# Altium PCB Grabber.PCBDOC (part 1 of 5)
Units mil, origin at the board's own origin, x right, y up, seen from the top; angles counter-clockwise.
Board outline 2854.33 x 3937 mil, 4 copper layers (TopLayer, Internal Plane 2, Layer 1, Bottom Layer), stack 60.752 mil thick; 159 components, 116 nets, 684 pads, 241 vias.
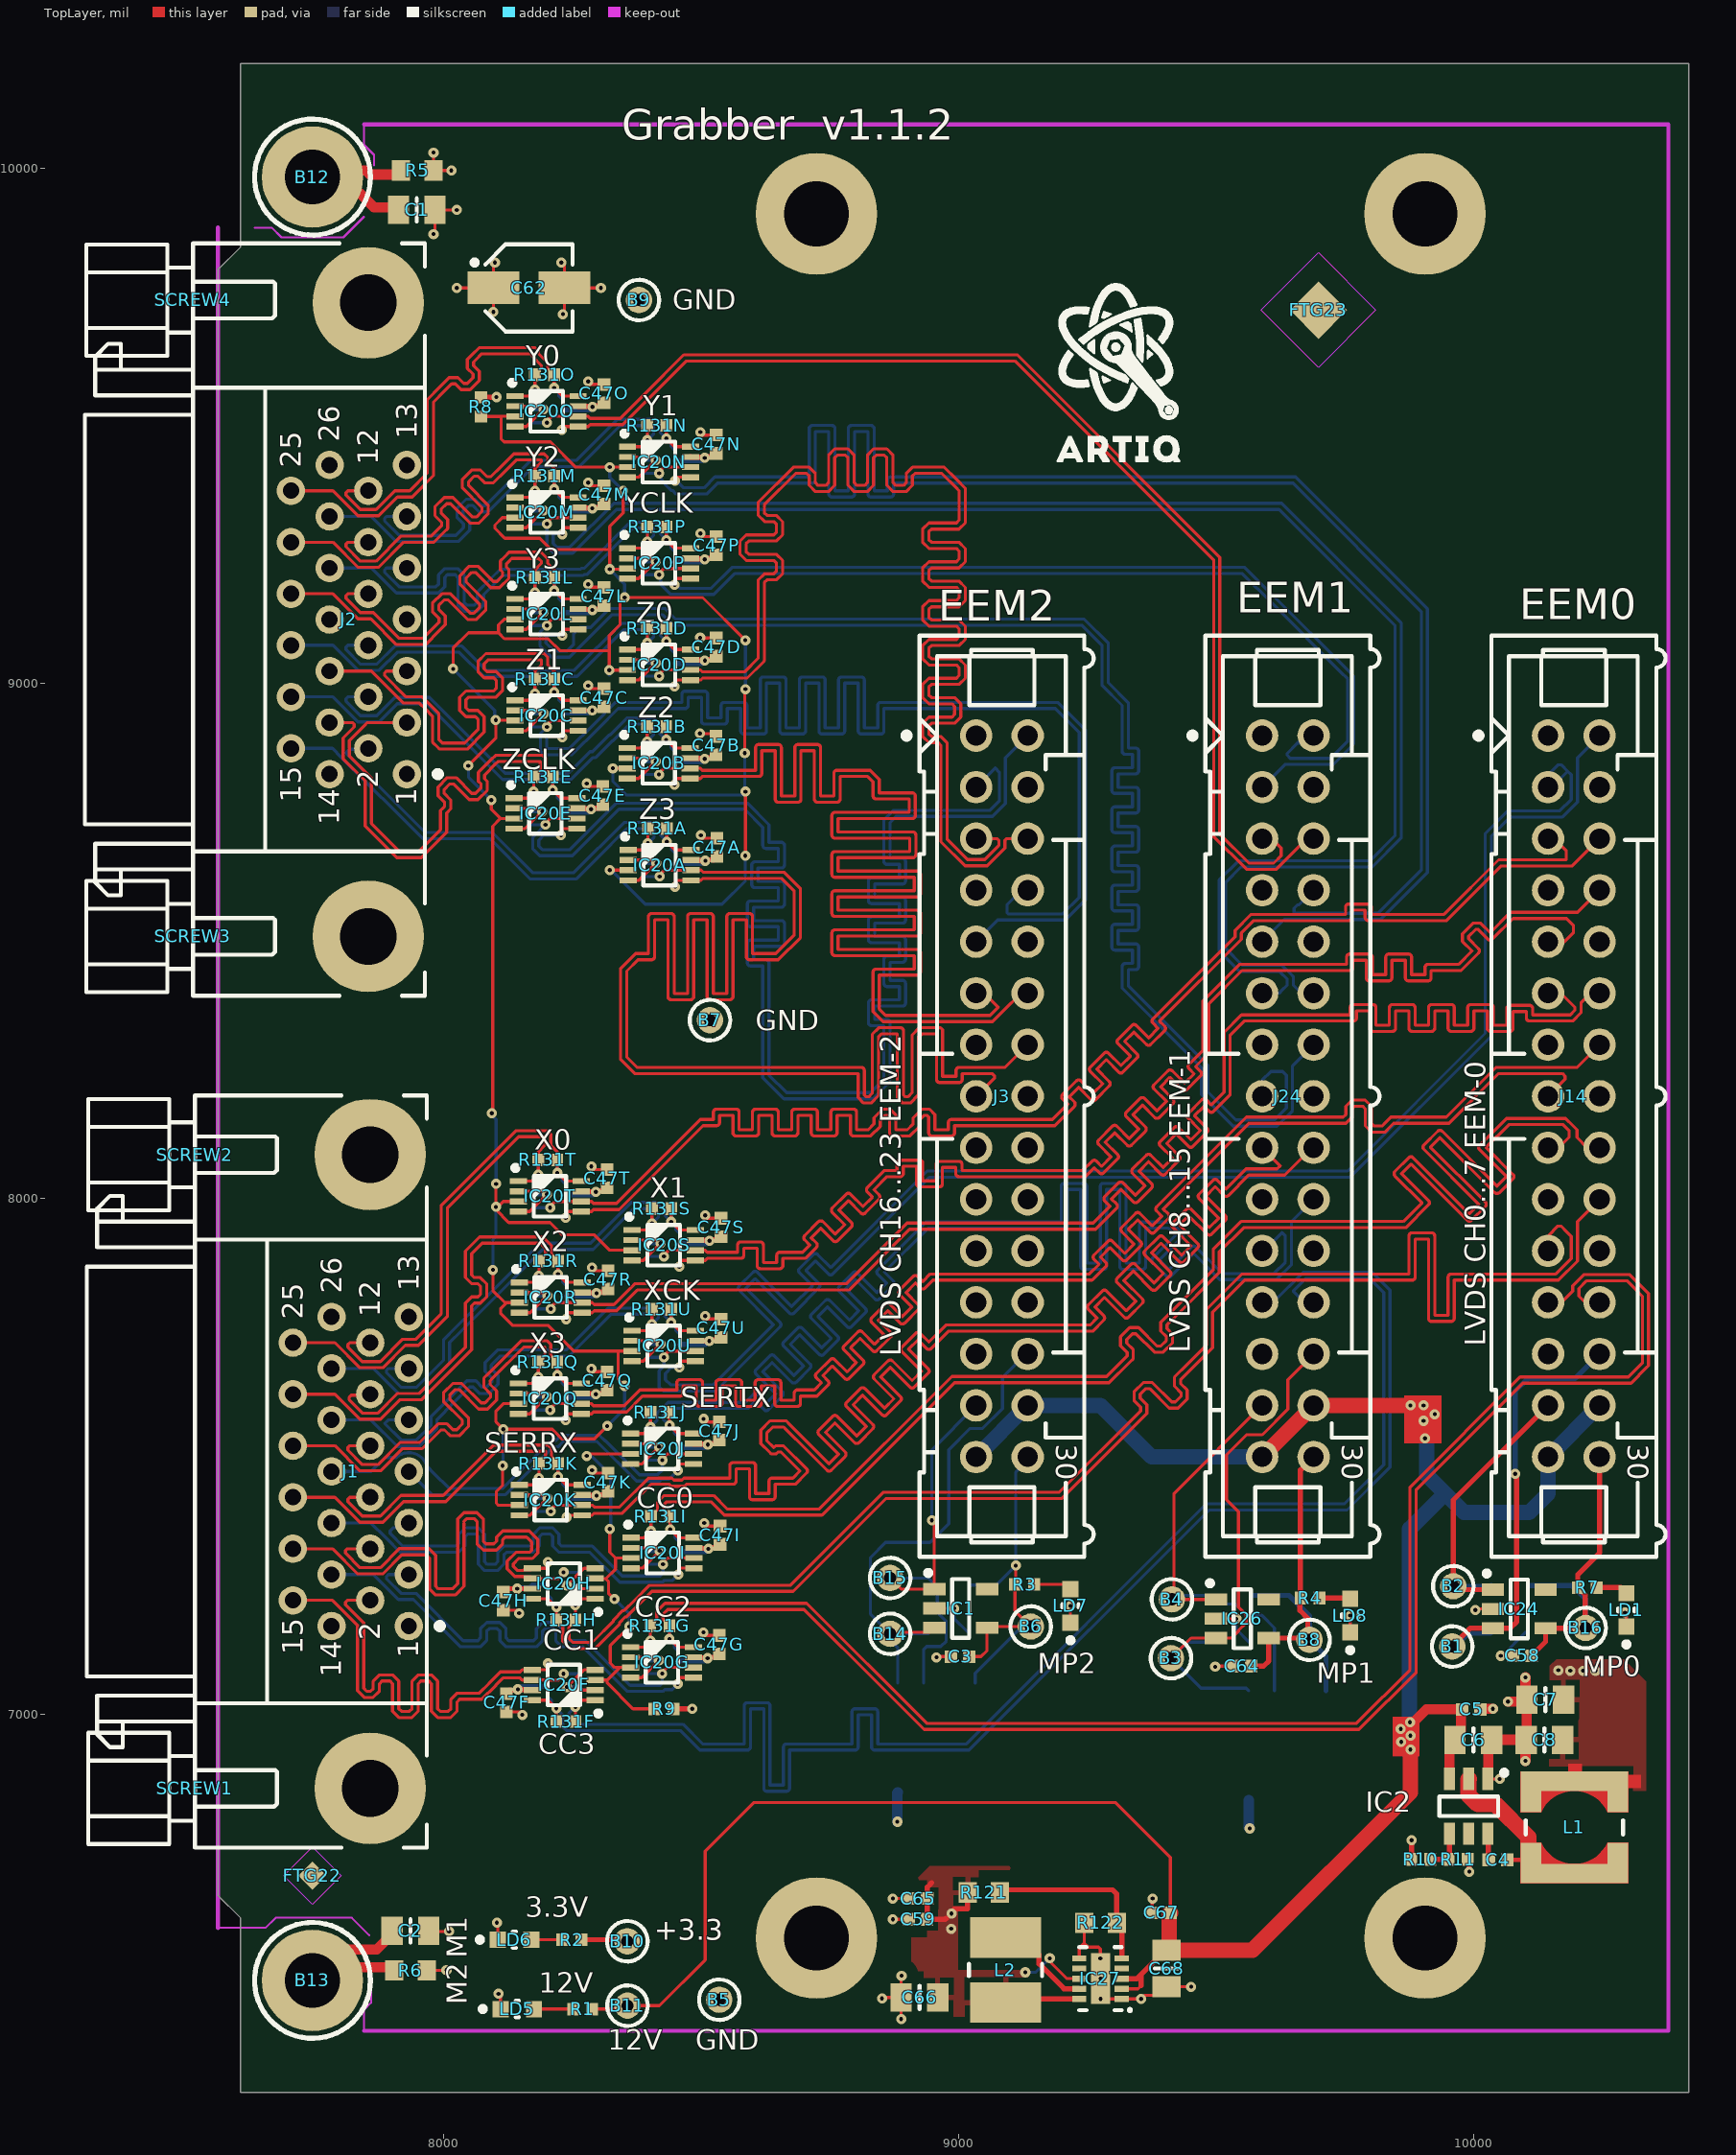
[diagram p0: TopLayer view]
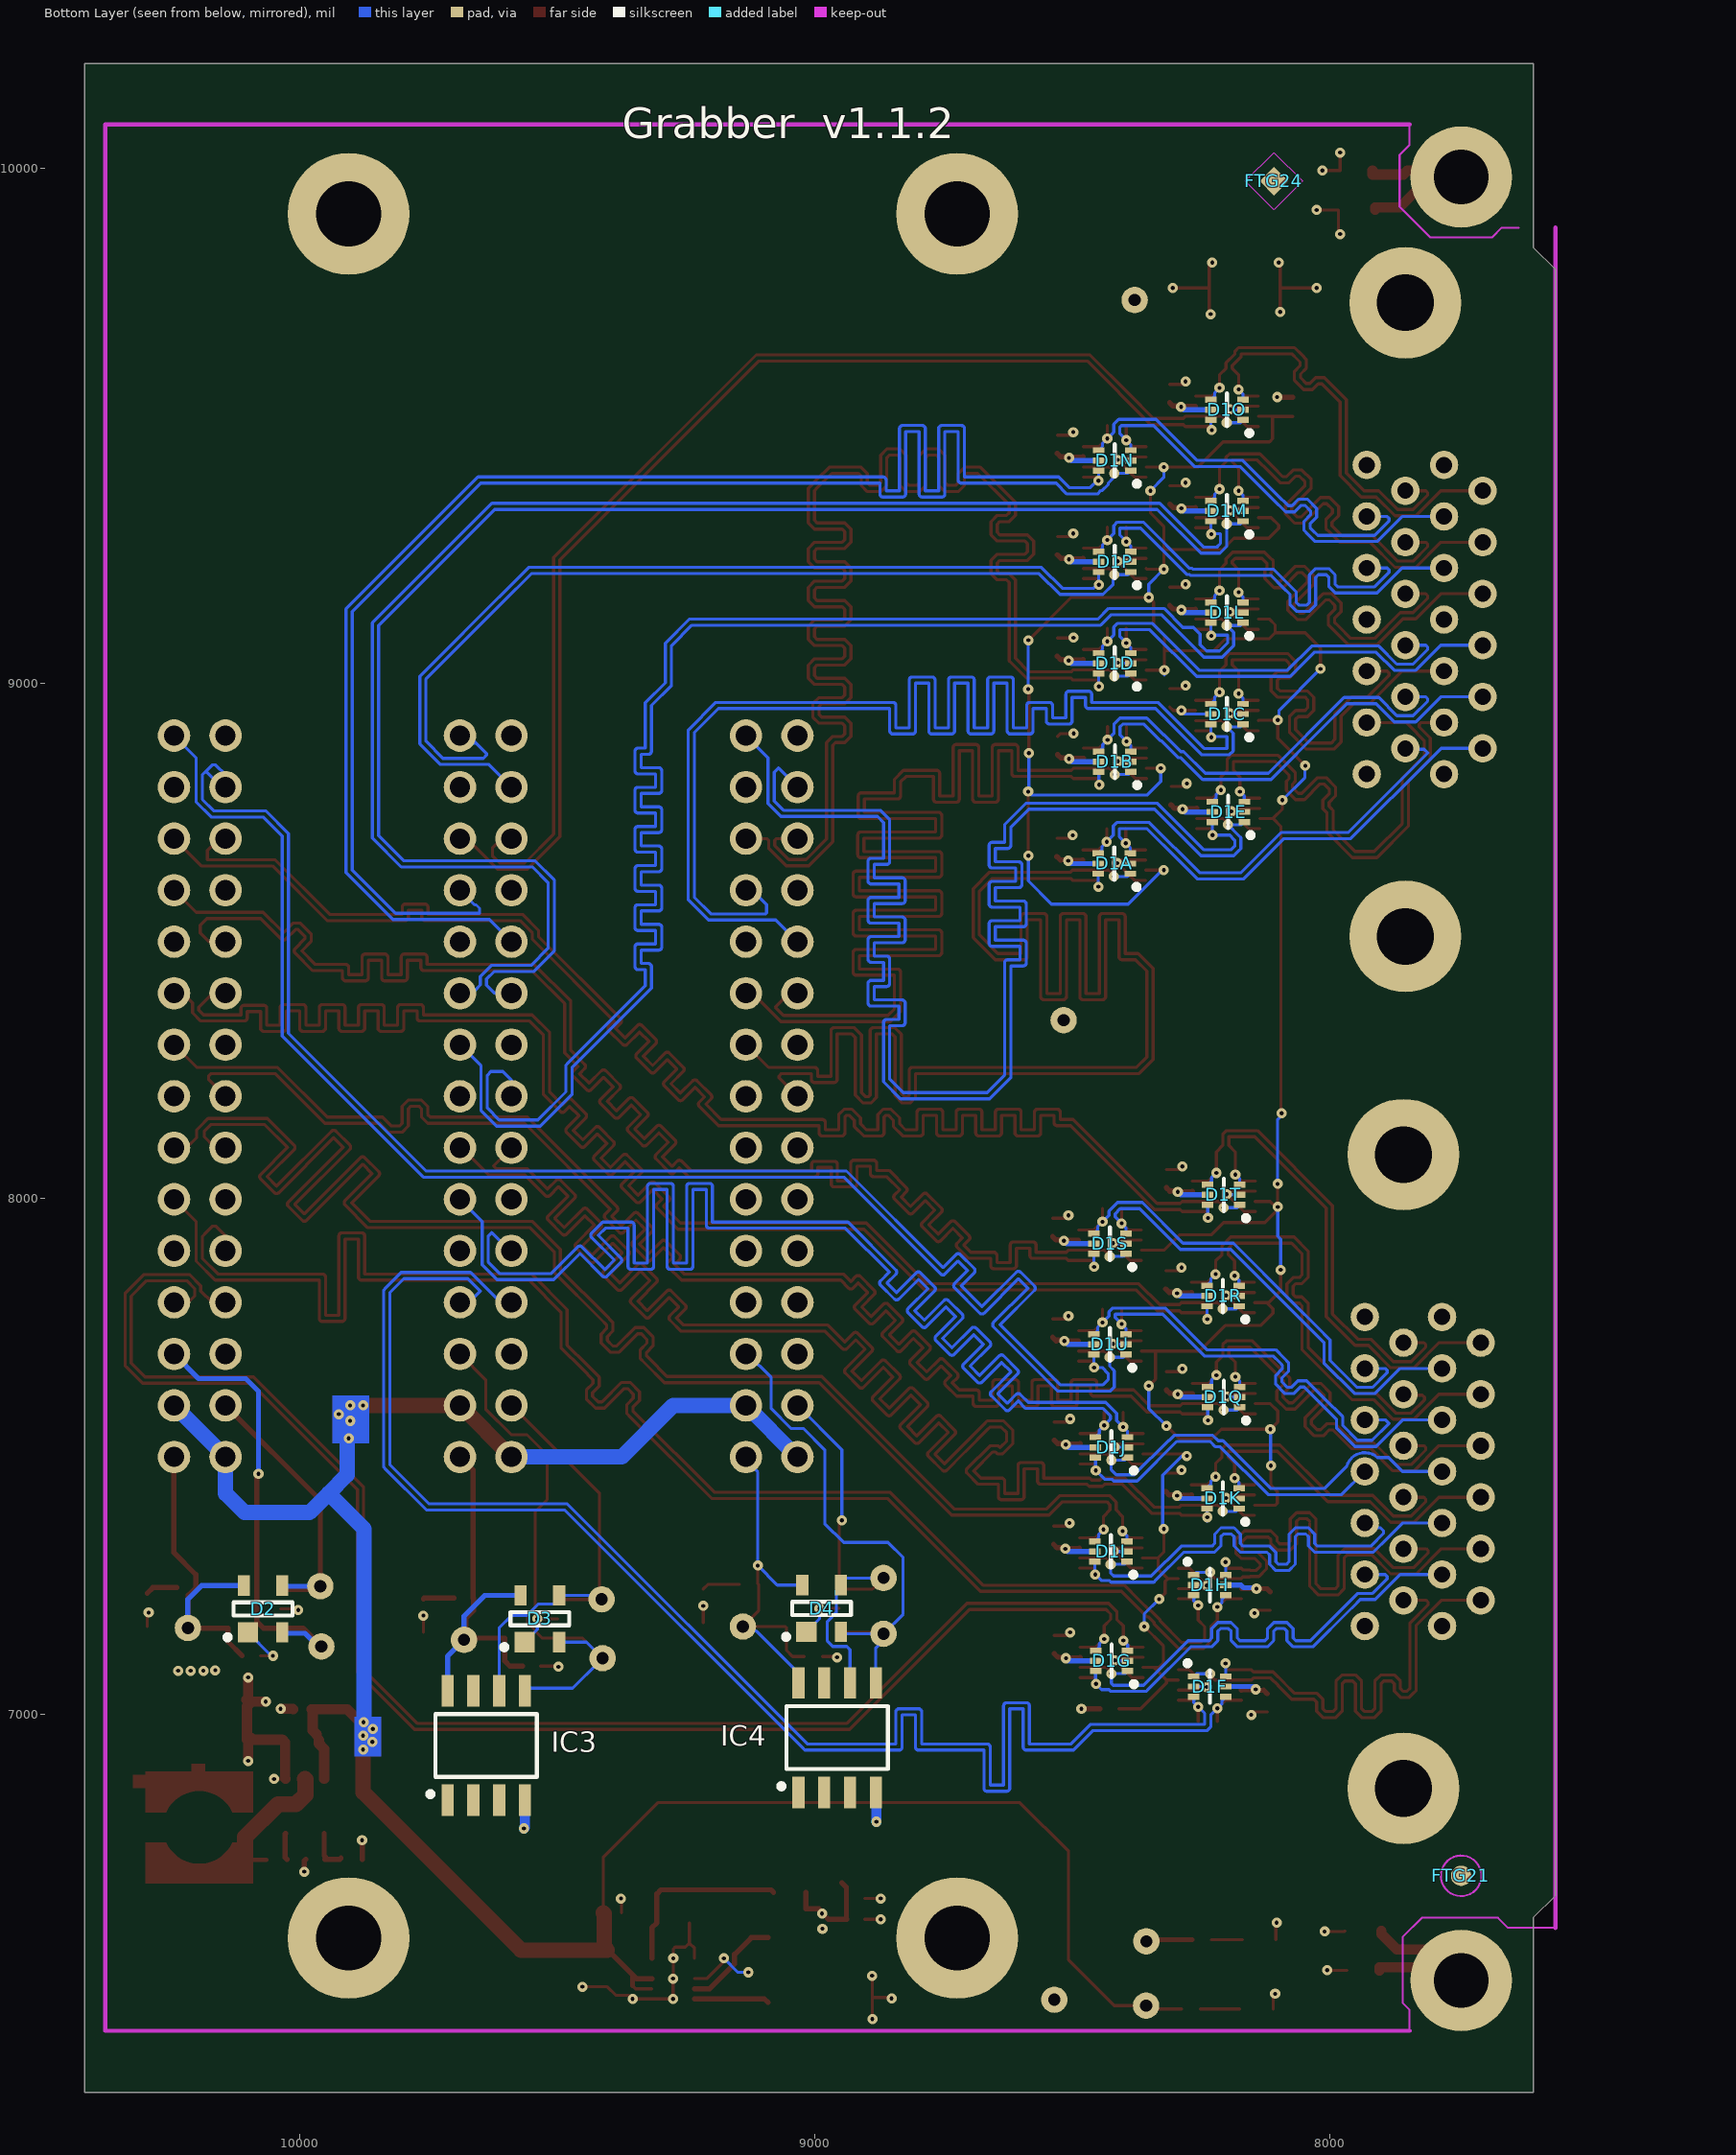
[diagram p1: Bottom Layer view, seen from below]
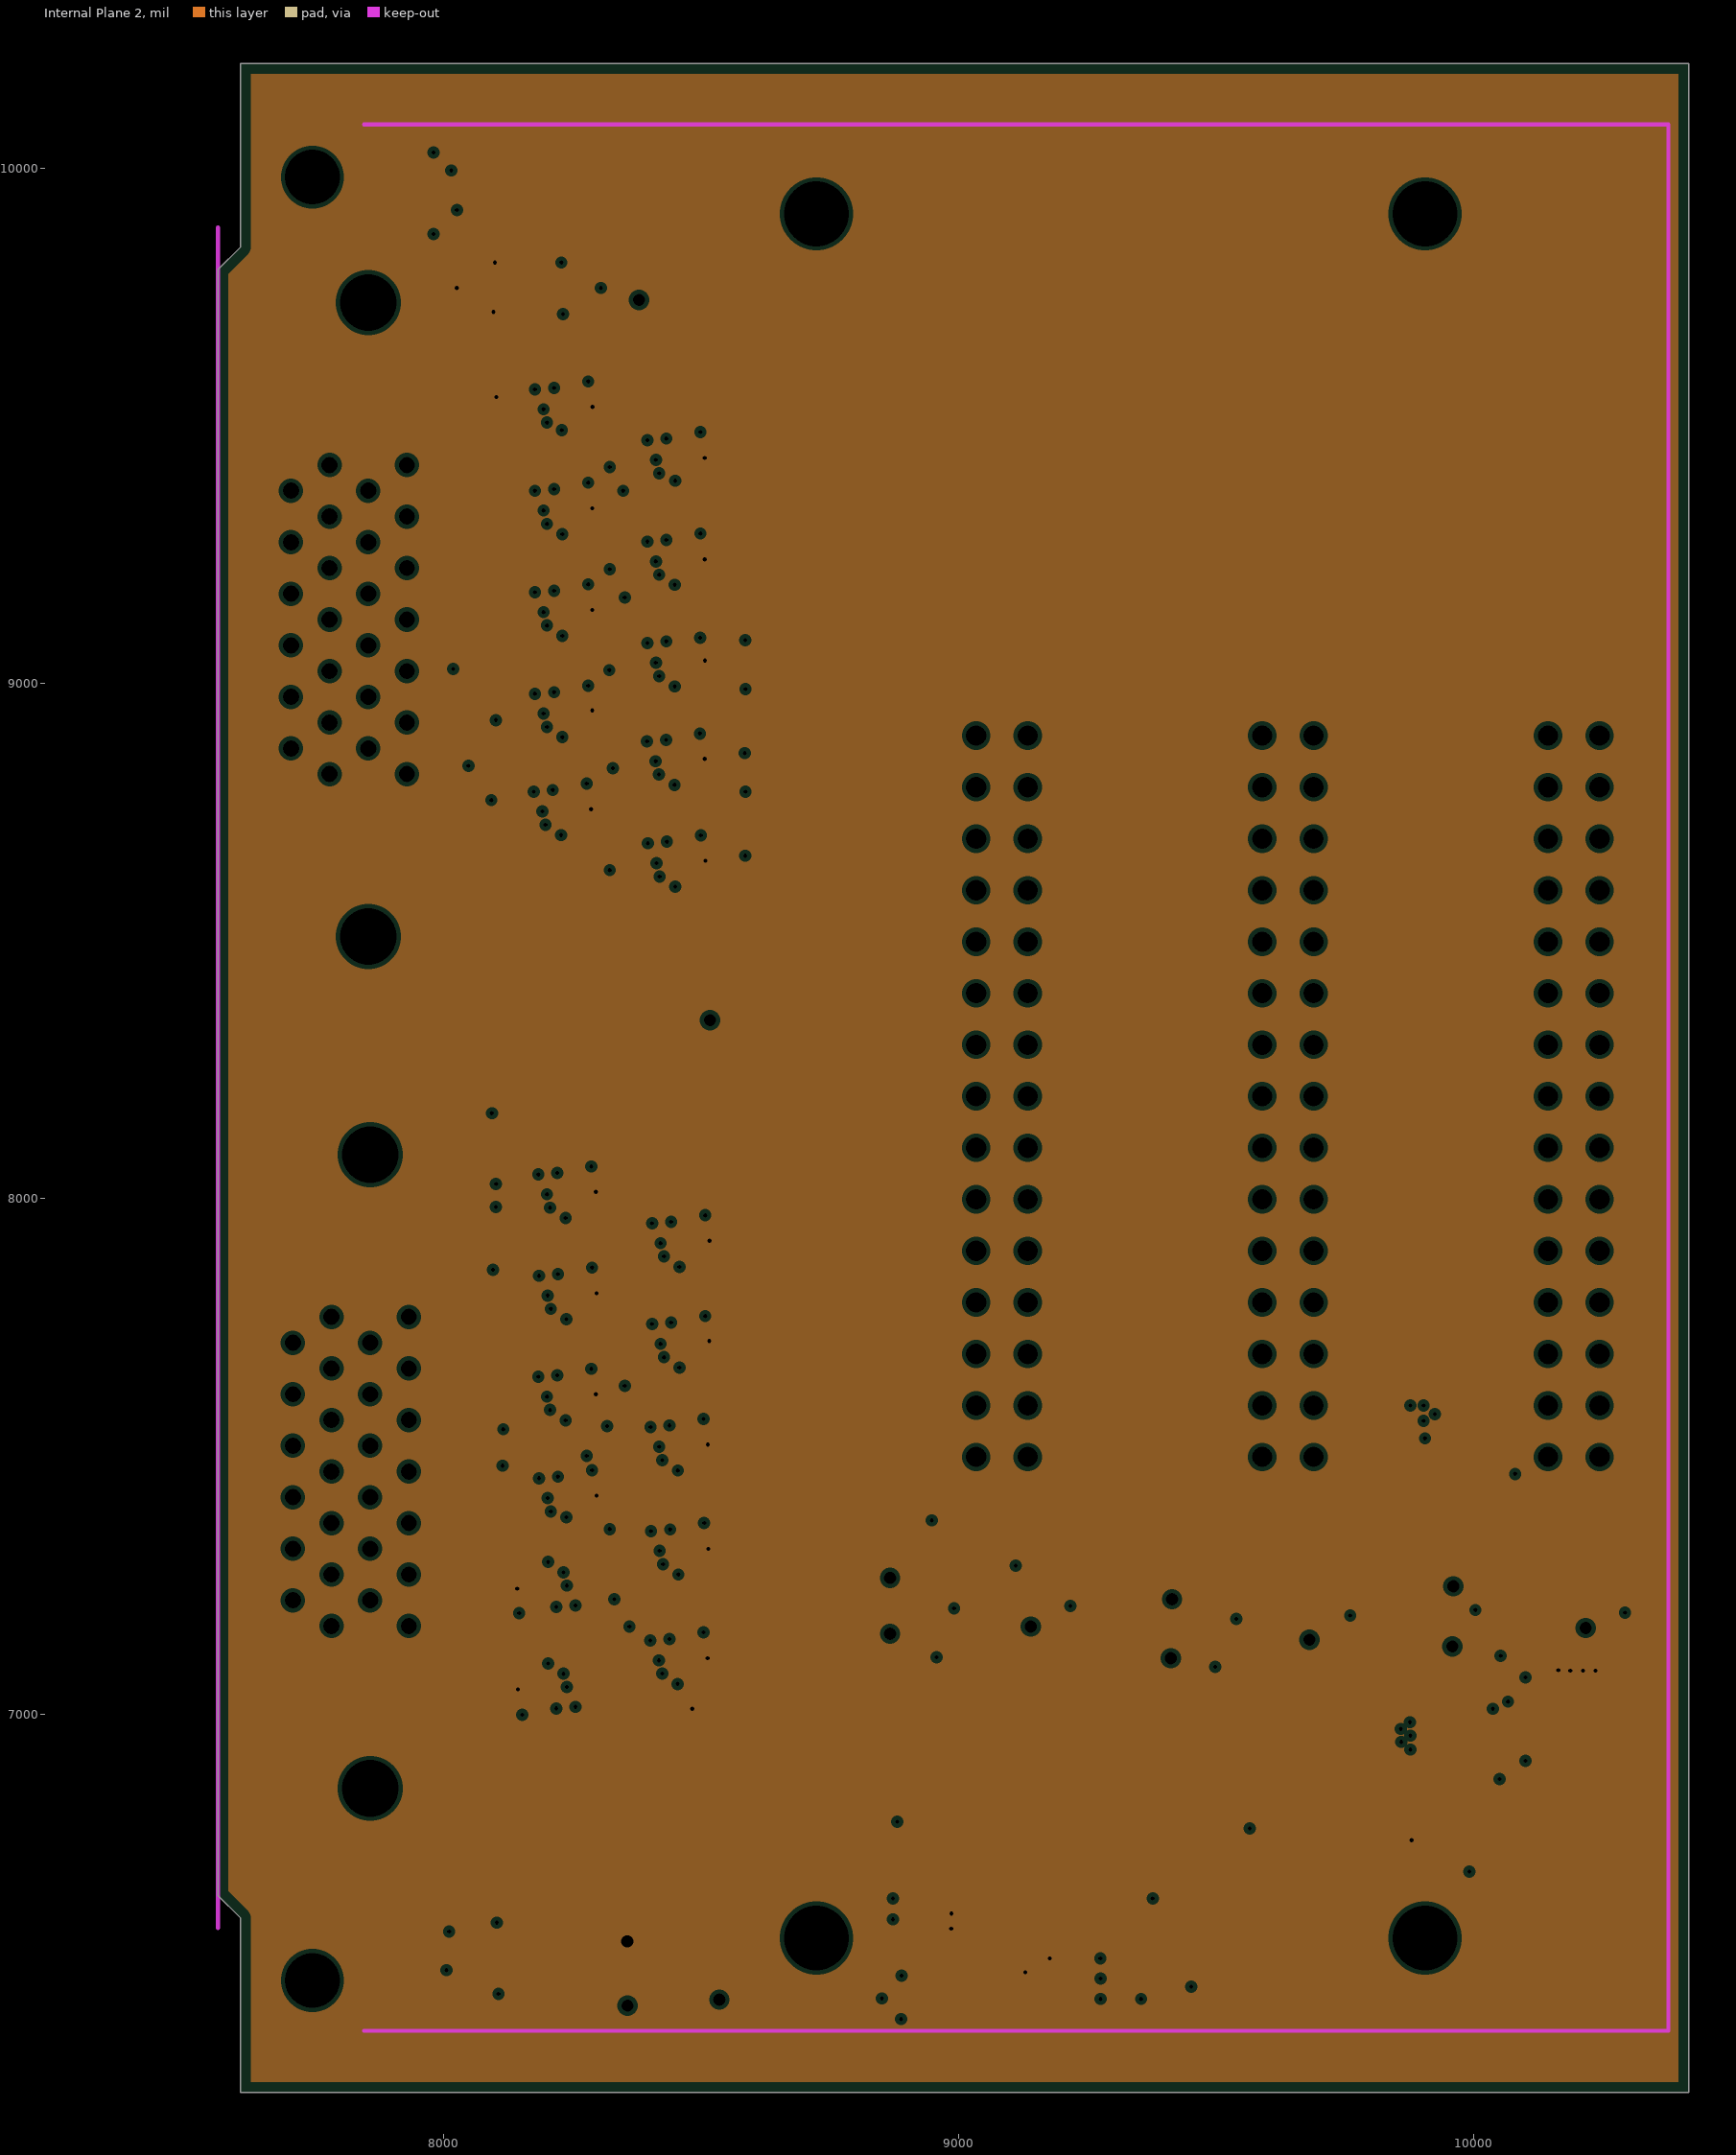
[diagram p2: Internal Plane 2, clearances drawn from the general rule]
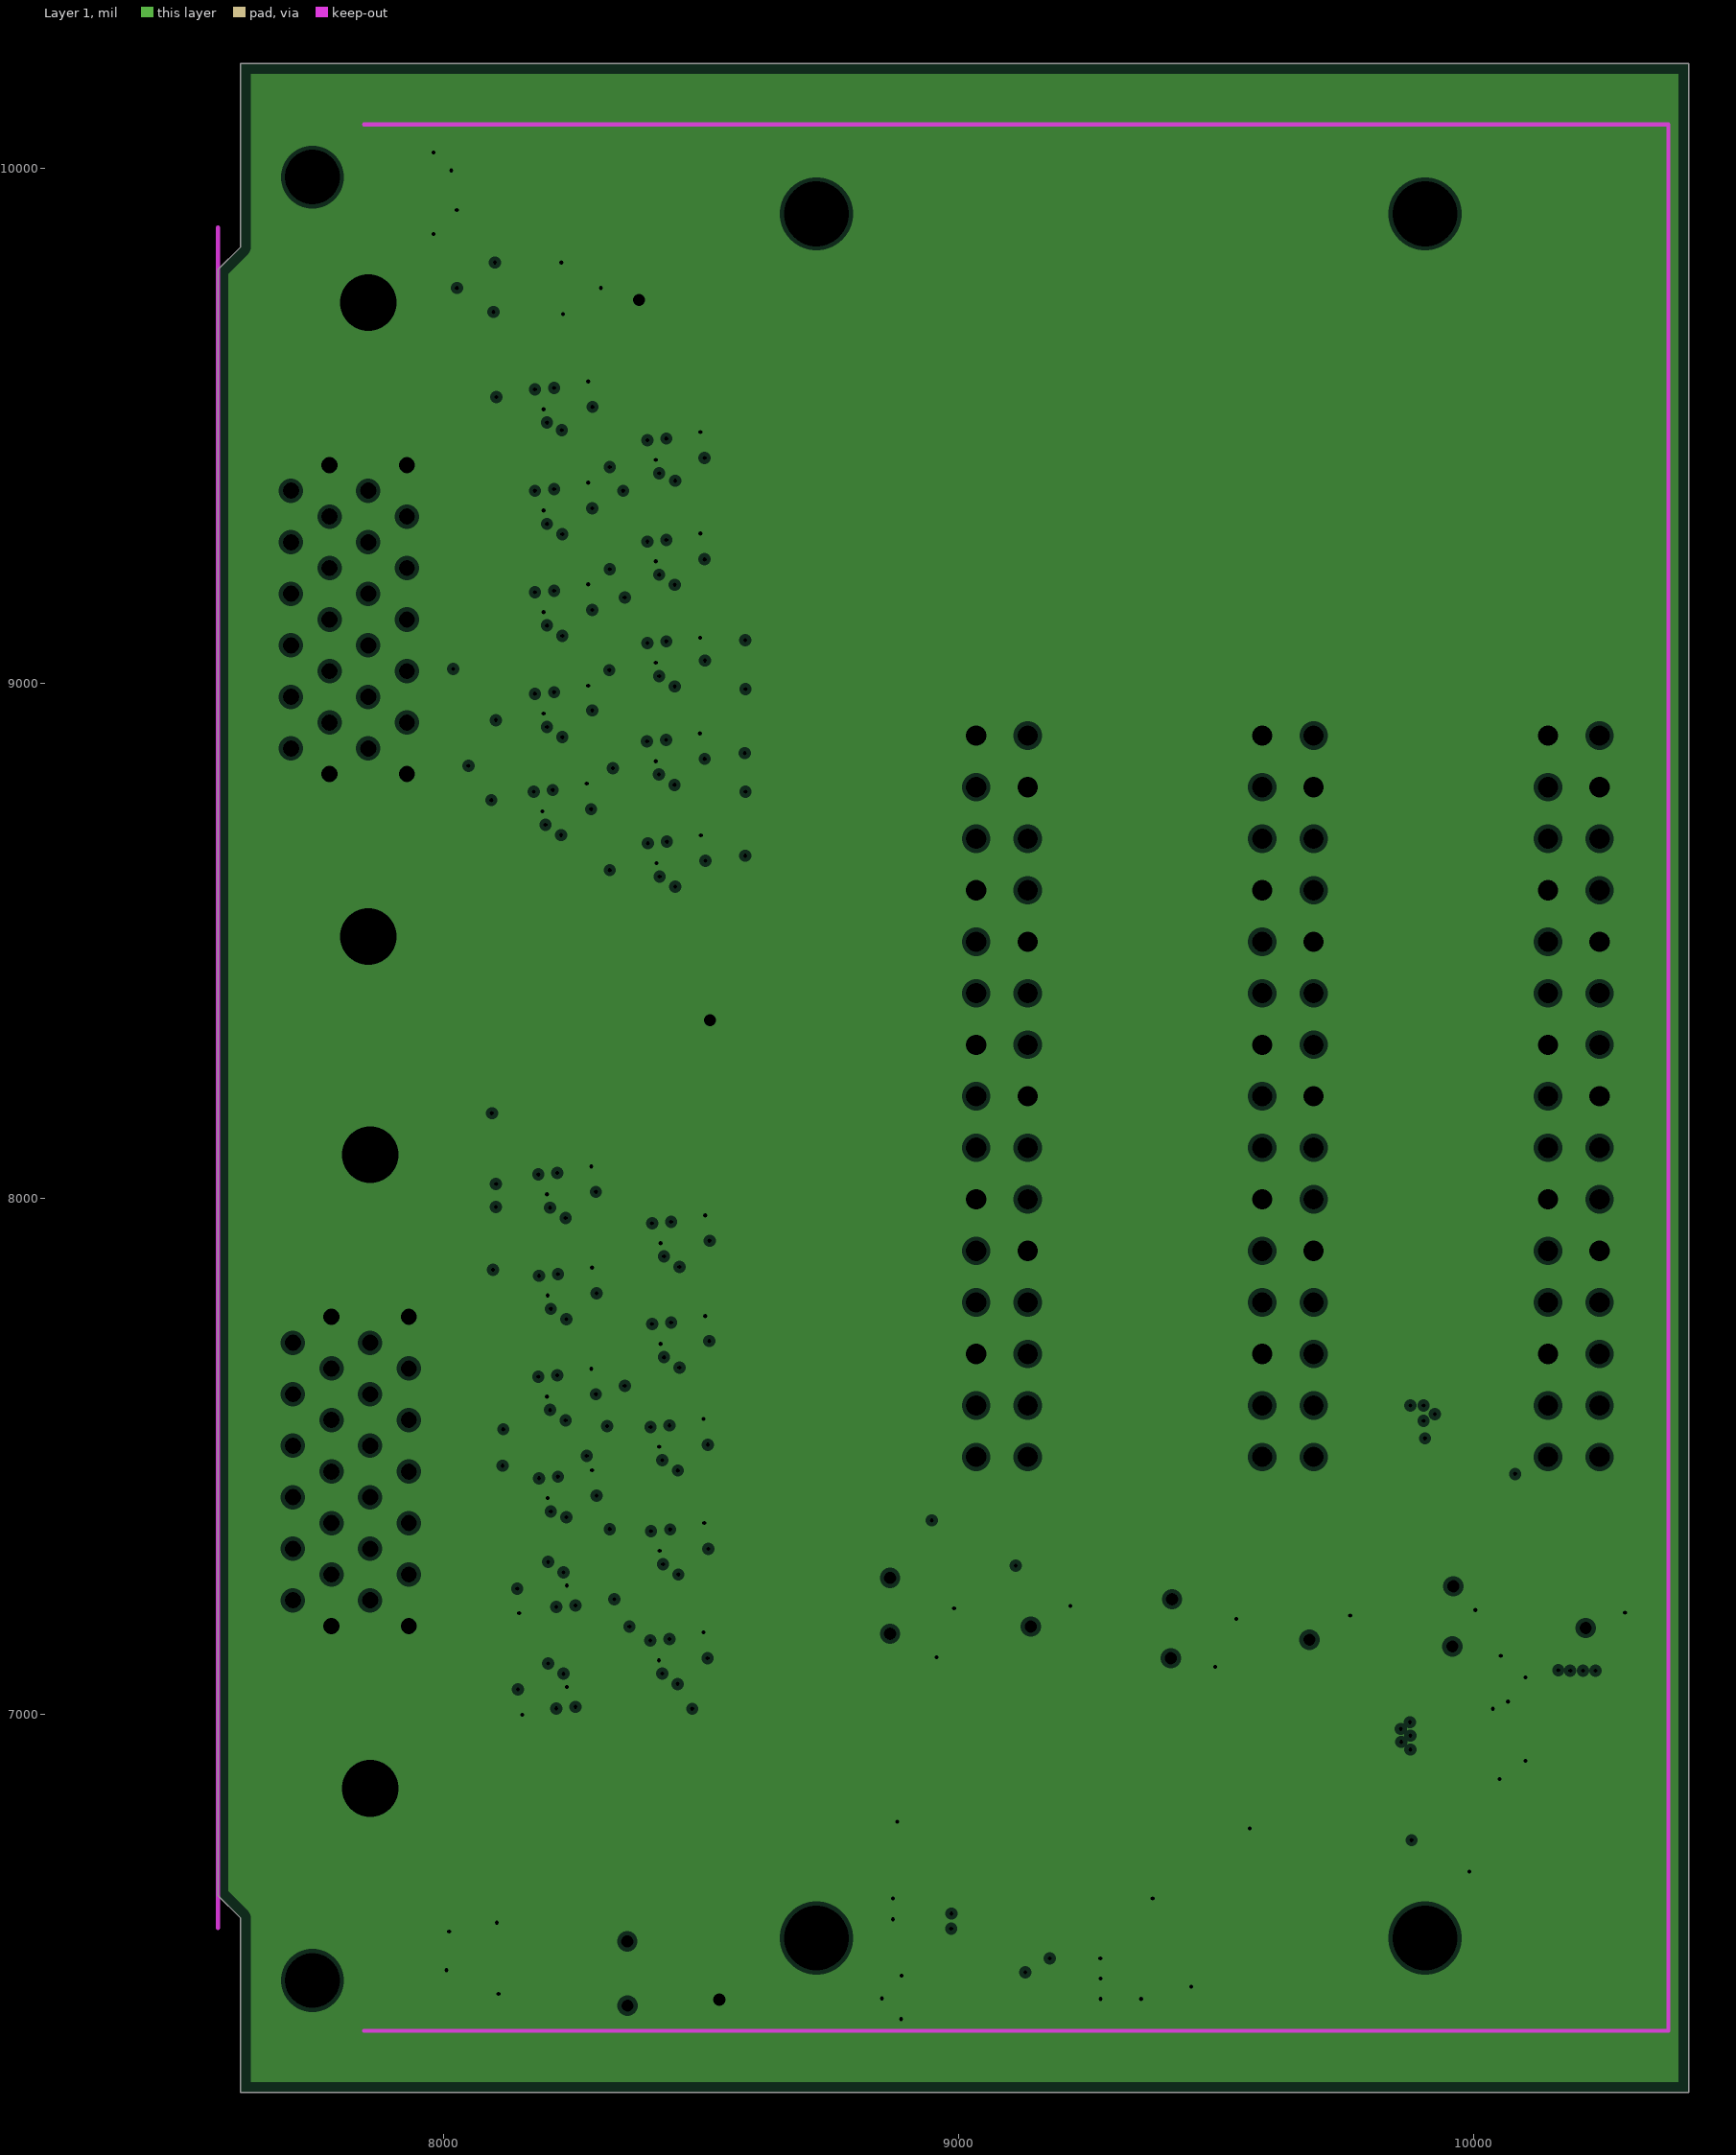
[diagram p3: Layer 1, clearances drawn from the general rule]
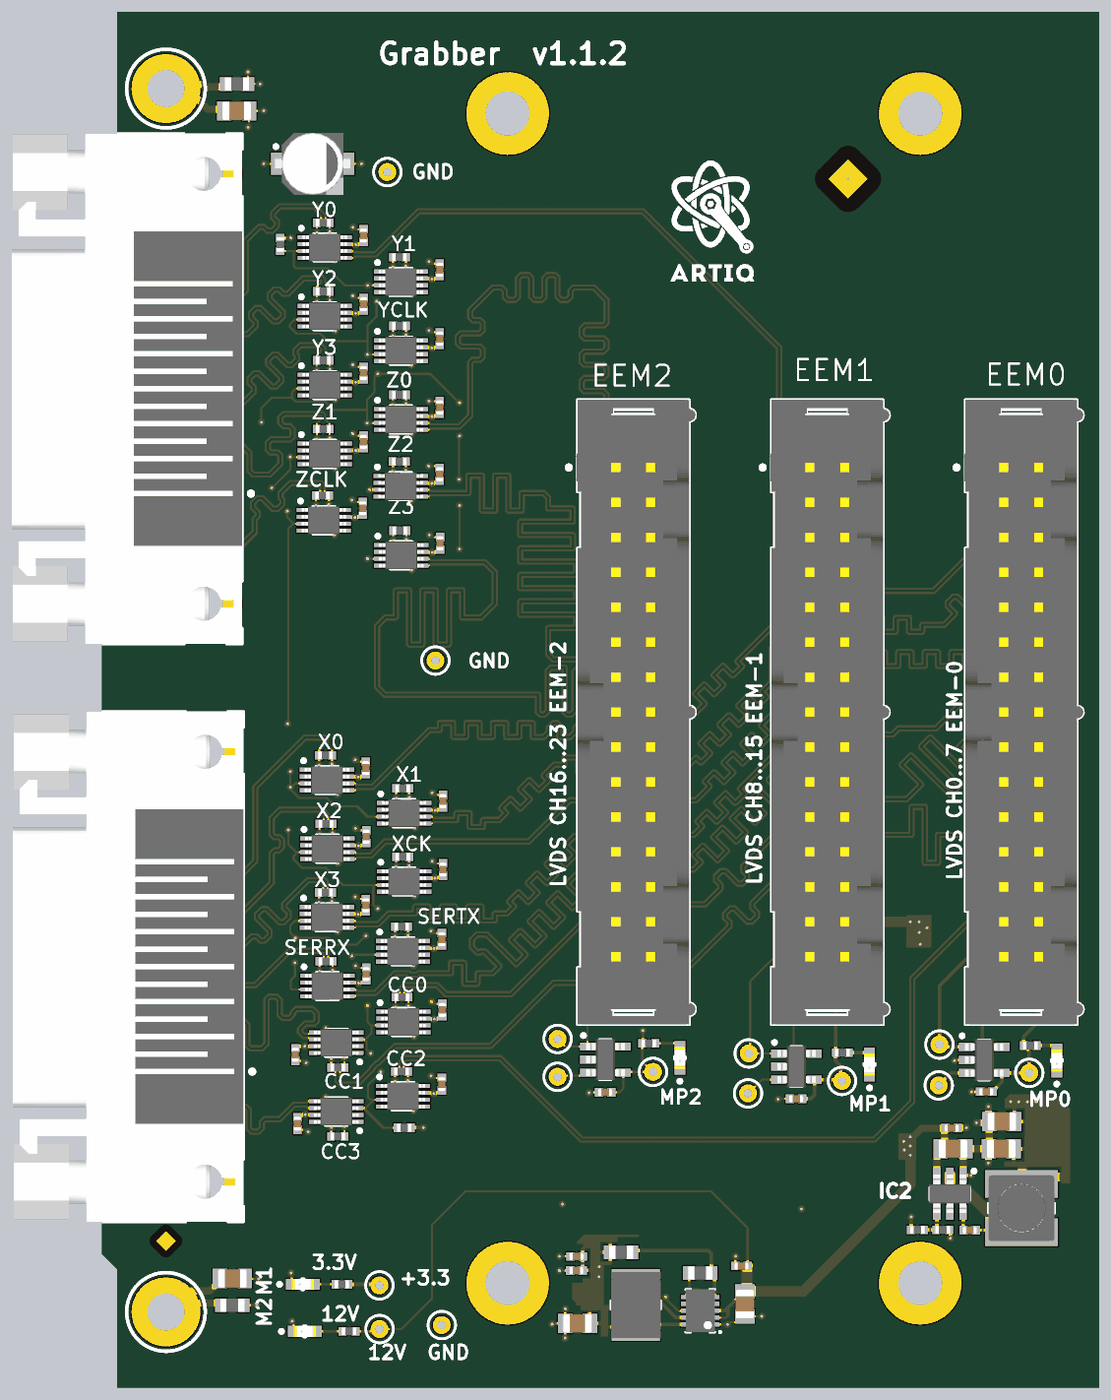
[diagram p7: 3D render of the assembled board from above, using the file's embedded part models]
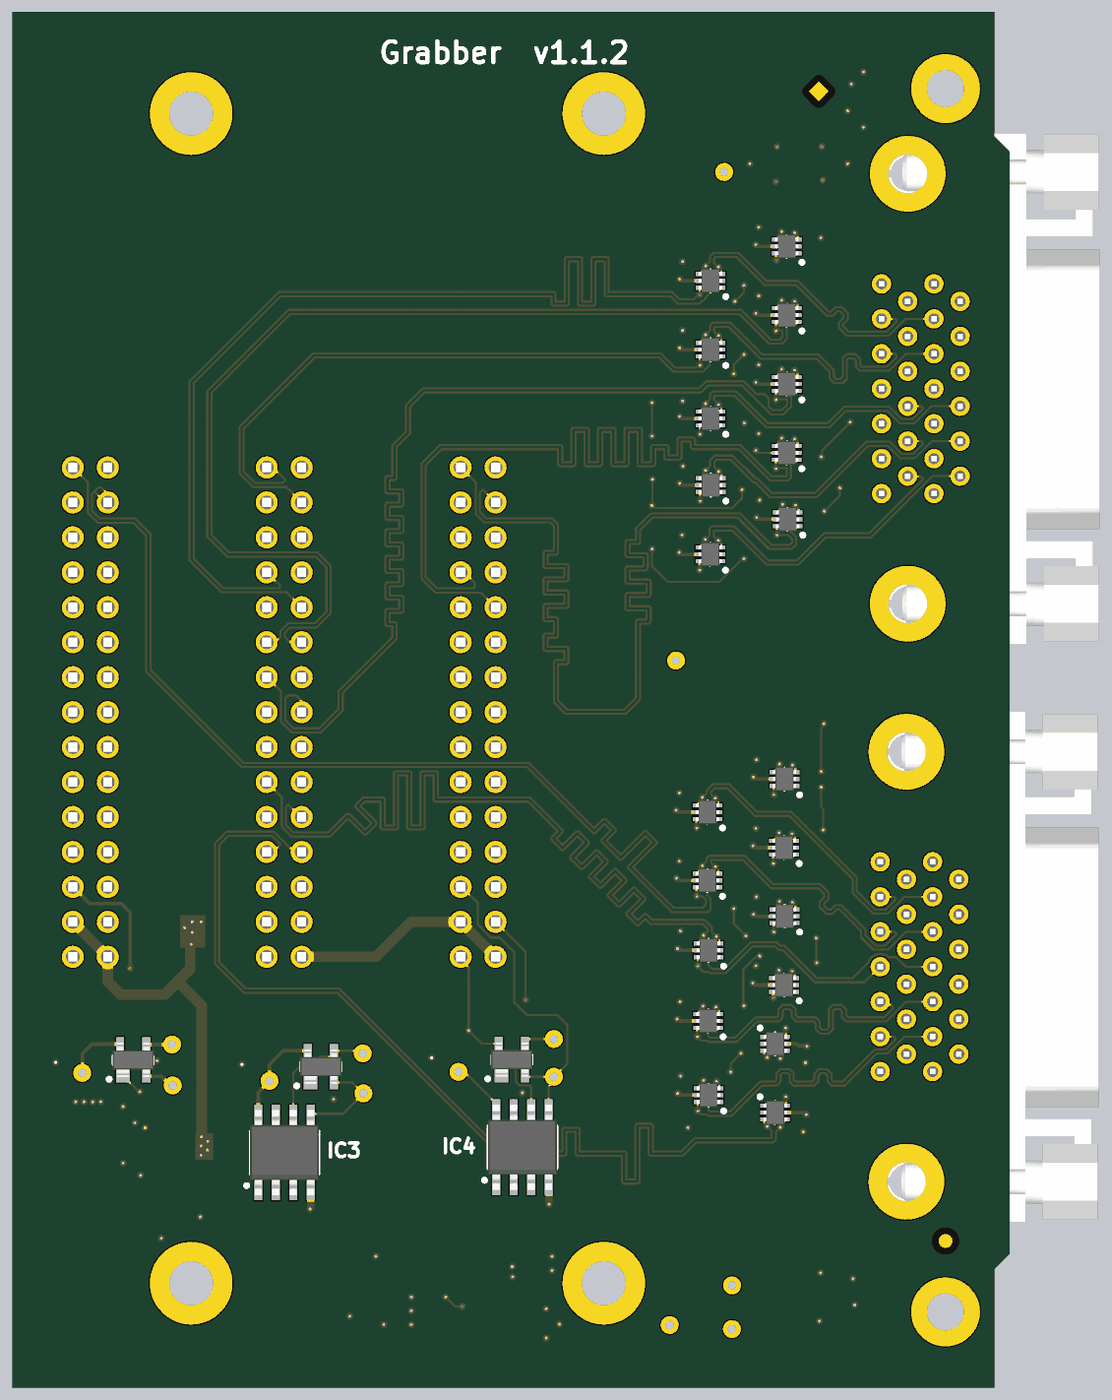
[diagram p8: 3D render of the assembled board from below, using the file's embedded part models]

## Layer stack, top to bottom
TopSolder: solder mask 2.0866, Solder Resist, Dk 3.5
TopLayer: signal copper 1.4
Dielectric1: core 7.874, FR-4, Dk 4.5
Internal Plane 2: plane copper 1.4169, net P3V3
Dielectric 4: prepreg 39.3701, Dk 4.5
Layer 1: plane copper 1.4169, net GND
Dielectric 1: core 7.874, FR-4, Dk 4.5
Bottom Layer: signal copper 1.4
Bottom Solder: solder mask 2.0866, Solder Resist, Dk 3.5

## Board outline
7606,6604.58 7562.69,6647.89 7562.69,9803.4 7606,9846.71 7606,10203 10417.02,10203 10417.02,6266 7606,6266

## Design rules (kind name [scope] priority, off if disabled: settings)
AcuteAngle [All] p1: minimum=4.50000000000000E+0001 checktracksonly=FALSE
Clearance Clearance_poly [(InPolygon)] p1: gap=23.62 ignorepadtopadclearanceinfootprint=FALSE except(0: Arc-Hole Track-Hole SMDPad-Hole THPad-Hole Via-Hole Fill-Hole Poly-Hole Region-Hole Text-Hole)
Clearance [All] p2: gap=6 ignorepadtopadclearanceinfootprint=FALSE except(0: Arc-Hole Track-Hole SMDPad-Hole THPad-Hole Via-Hole Fill-Hole Poly-Hole Region-Hole Text-Hole)
ComponentClearance [All] p1: gap=10 collisioncheckmode=3 verticalgap=0 showdistances=FALSE
DiffPairsRouting [All] p1: maxlimit=6 minlimit=6 mostfreqgap=6 toplayer_minwidth=6 toplayer_maxwidth=6 toplayer_prefwidth=6 bottomlayer_minwidth=6 bottomlayer_maxwidth=6 bottomlayer_prefwidth=6 maxuncoupledlength=500
Height [All] p1 off: minheight=0 maxheight=1000 prefheight=500
HoleSize [All] p1: absolutevalues=TRUE maxlimit=200 minlimit=1 maxpercent=80.000 minpercent=20.000
MatchedLengths MatchedLengths_EEM [InNetClass('EEM_LVDS')] p1: tolerance=150 checknetsindiffpair=FALSE checkdiffpairvsdiffpair=TRUE checkxsignals=TRUE checkothers=TRUE
MatchedLengths MatchedLengths_CL [InNetClass('CL_LVDS')] p2: tolerance=150 checknetsindiffpair=FALSE checkdiffpairvsdiffpair=TRUE checkxsignals=TRUE checkothers=TRUE
MinimumSolderMaskSliver [All] p1: minsoldermaskwidth=0
MinimumSolderMaskSliver SilkscreenOverComponentPads [All] p2: minsoldermaskwidth=10
PlaneClearance [All] p1: clearance=8
PlaneConnect PlaneConnect_pad [(InPadClass('All Pads'))] p1: planeconnectstyle=Relief reliefexpansion=20 reliefentries=4 reliefconductorwidth=10 reliefairgap=10
PlaneConnect [All] p2: planeconnectstyle=Direct reliefexpansion=20 reliefentries=4 reliefconductorwidth=10 reliefairgap=10
PolygonConnect PolygonConnect_pad [(InPadClass('All Pads'))] p1: connectstyle=Relief reliefconductorwidth=10 reliefentries=4 polygonreliefangle="90 Angle" airgapwidth=10
PolygonConnect [All] p2: connectstyle=Direct reliefconductorwidth=10 reliefentries=4 polygonreliefangle="90 Angle" airgapwidth=10
RoomDefinition U_LVDS_repeater10 [InComponentClass('U_LVDS_repeater10')] p1: confinementstyle=ConfineIn formatcopy=TRUE lockcomponents=FALSE outline 4947.91,7350.43 4730,7350.43 4730,7192.64 4947.91,7192.64
RoomDefinition U_LVDS_repeater7 [InComponentClass('U_LVDS_repeater7')] p2: confinementstyle=ConfineIn formatcopy=TRUE lockcomponents=FALSE outline 4947.64,6936.02 4729.72,6936.02 4729.72,6778.23 4947.64,6778.23
RoomDefinition U_LVDS_repeater6 [InComponentClass('U_LVDS_repeater6')] p3: confinementstyle=ConfineIn formatcopy=TRUE lockcomponents=FALSE outline 4498.35,6688.62 4716.26,6688.62 4716.26,6846.42 4498.35,6846.42
RoomDefinition U_LVDS_repeater2 [InComponentClass('U_LVDS_repeater2')] p4: confinementstyle=ConfineIn formatcopy=TRUE lockcomponents=FALSE outline 4941.34,8681.1 4723.43,8681.1 4723.43,8523.31 4941.34,8523.31
RoomDefinition U_LVDS_repeater21 [InComponentClass('U_LVDS_repeater21')] p5: confinementstyle=ConfineIn formatcopy=TRUE lockcomponents=FALSE outline 4950.99,7550.2 4733.07,7550.2 4733.07,7392.4 4950.99,7392.4
RoomDefinition U_LVDS_repeater20 [InComponentClass('U_LVDS_repeater20')] p6: confinementstyle=ConfineIn formatcopy=TRUE lockcomponents=FALSE outline 4730.12,7840.51 4512.2,7840.51 4512.2,7682.72 4730.12,7682.72
RoomDefinition U_LVDS_repeater19 [InComponentClass('U_LVDS_repeater19')] p7: confinementstyle=ConfineIn formatcopy=TRUE lockcomponents=FALSE outline 4950.98,7745.71 4733.07,7745.71 4733.07,7587.91 4950.98,7587.91
RoomDefinition U_LVDS_repeater18 [InComponentClass('U_LVDS_repeater18')] p8: confinementstyle=ConfineIn formatcopy=TRUE lockcomponents=FALSE outline 4731.5,7644.02 4513.58,7644.02 4513.58,7486.22 4731.5,7486.22
RoomDefinition U_LVDS_repeater17 [InComponentClass('U_LVDS_repeater17')] p9: confinementstyle=ConfineIn formatcopy=TRUE lockcomponents=FALSE outline 4730.12,7447.83 4512.2,7447.83 4512.2,7290.04 4730.12,7290.04
RoomDefinition Grabber [InComponentClass('Grabber')] p10: confinementstyle=ConfineIn formatcopy=TRUE lockcomponents=FALSE outline 6540,6070 4258.11,6070 4258.11,6430 6540,6430
RoomDefinition U_LVDS_repeater16 [InComponentClass('U_LVDS_repeater16')] p11: confinementstyle=ConfineIn formatcopy=TRUE lockcomponents=FALSE outline 4941.73,9068.9 4723.82,9068.9 4723.82,8911.1 4941.73,8911.1
RoomDefinition U_LVDS_repeater15 [InComponentClass('U_LVDS_repeater15')] p12: confinementstyle=ConfineIn formatcopy=TRUE lockcomponents=FALSE outline 4723.82,9364.17 4505.91,9364.17 4505.91,9206.38 4723.82,9206.38
RoomDefinition U_LVDS_repeater14 [InComponentClass('U_LVDS_repeater14')] p13: confinementstyle=ConfineIn formatcopy=TRUE lockcomponents=FALSE outline 4941.73,9265.75 4723.82,9265.75 4723.82,9107.95 4941.73,9107.95
RoomDefinition U_LVDS_repeater13 [InComponentClass('U_LVDS_repeater13')] p14: confinementstyle=ConfineIn formatcopy=TRUE lockcomponents=FALSE outline 4723.82,9167.6 4505.91,9167.6 4505.91,9009.8 4723.82,9009.8
RoomDefinition U_LVDS_repeater12 [InComponentClass('U_LVDS_repeater12')] p15: confinementstyle=ConfineIn formatcopy=TRUE lockcomponents=FALSE outline 4723.82,8970.47 4505.91,8970.47 4505.91,8812.68 4723.82,8812.68
RoomDefinition U_LVDS_repeater11 [InComponentClass('U_LVDS_repeater11')] p16: confinementstyle=ConfineIn formatcopy=TRUE lockcomponents=FALSE outline 4731.5,7251.02 4513.58,7251.02 4513.58,7093.23 4731.5,7093.23
RoomDefinition U_LVDS_repeater9 [InComponentClass('U_LVDS_repeater9')] p17: confinementstyle=ConfineIn formatcopy=TRUE lockcomponents=FALSE outline 4949.02,7148.35 4731.1,7148.35 4731.1,6990.55 4949.02,6990.55
RoomDefinition U_LVDS_repeater8 [InComponentClass('U_LVDS_repeater8')] p18: confinementstyle=ConfineIn formatcopy=TRUE lockcomponents=FALSE outline 4498.35,6885.47 4716.26,6885.47 4716.26,7043.27 4498.35,7043.27
RoomDefinition U_LVDS_repeater5 [InComponentClass('U_LVDS_repeater5')] p19: confinementstyle=ConfineIn formatcopy=TRUE lockcomponents=FALSE outline 4721.26,8583.66 4503.35,8583.66 4503.35,8425.87 4721.26,8425.87
RoomDefinition U_LVDS_repeater4 [InComponentClass('U_LVDS_repeater4')] p20: confinementstyle=ConfineIn formatcopy=TRUE lockcomponents=FALSE outline 4941.73,8872.05 4723.82,8872.05 4723.82,8714.25 4941.73,8714.25
RoomDefinition U_LVDS_repeater3 [InComponentClass('U_LVDS_repeater3')] p21: confinementstyle=ConfineIn formatcopy=TRUE lockcomponents=FALSE outline 4723.82,8773.62 4505.91,8773.62 4505.91,8615.83 4723.82,8615.83
RoomDefinition U_LVDS_repeater1 [InComponentClass('U_LVDS_repeater1')] p22: confinementstyle=ConfineIn formatcopy=TRUE lockcomponents=FALSE outline 4942.72,8483.31 4724.8,8483.31 4724.8,8325.51 4942.72,8325.51
RoutingVias [All] p1: holewidth=7.87 width=19.68 viastyle="Through Hole" minholewidth=7.87 minwidth=19.68 maxholewidth=19.68 maxwidth=39.37
SilkToSilkClearance [All] p1: silktosilkclearance=0
SolderMaskExpansion [All] p1: expansion=4 istentingtop=FALSE
ViasUnderSMD ViasUnderSMD_allow [InComponent('IC18') or InComponent('IC10') or InComponent('IC13') or InComponent('IC14') or InComponent('IC15')] p1: allowed=TRUE
ViasUnderSMD [All] p2: allowed=FALSE
Width Width_1 [(InDifferentialPairClass('All Differential Pairs'))] p1: maxlimit=8 minlimit=8 preferedwidth=8
Width [All] p2: maxlimit=100 minlimit=6 preferedwidth=10
22 further rules are at their usual default settings.

## Classes and differential pairs
net class EEM_LVDS: LVDS0_N LVDS0_P LVDS1_N LVDS1_P LVDS2_N LVDS2_P LVDS3_N LVDS3_P LVDS4_N LVDS4_P LVDS5_N LVDS5_P LVDS6_N LVDS6_P LVDS7_N LVDS7_P LVDS16_N LVDS16_P LVDS17_N LVDS17_P LVDS18_N LVDS18_P LVDS19_N LVDS19_P LVDS20_N LVDS20_P SerTX_N SerTX_P
net class CL_LVDS: CC0_N CC0_P CC1_N CC1_P CC2_N CC2_P CC3_N CC3_P SerRX_N SerRX_P SerTX_N SerTX_P X0_N X0_P X1_N X1_P X2_N X2_P X3_N X3_P XCLK_N XCLK_P Y0_N Y0_P Y1_N Y1_P Y2_N Y2_P Y3_N Y3_P YCLK_N YCLK_P Z0_N Z0_P Z1_N Z1_P Z2_N Z2_P Z3_N Z3_P ZCLK_N ZCLK_P
component class U_LVDS_repeater2: C47B D1B IC20B R131B
component class U_LVDS_repeater21: C47U D1U IC20U R131U
component class U_LVDS_repeater20: C47T D1T IC20T R131T
component class U_LVDS_repeater19: C47S D1S IC20S R131S
component class U_LVDS_repeater18: C47R D1R IC20R R131R
component class U_LVDS_repeater17: C47Q D1Q IC20Q R131Q
channel class LVDS_repeater: U_LVDS_repeater1 U_LVDS_repeater2 U_LVDS_repeater3 U_LVDS_repeater4 U_LVDS_repeater5 U_LVDS_repeater6 U_LVDS_repeater7 U_LVDS_repeater8 U_LVDS_repeater9 U_LVDS_repeater10 U_LVDS_repeater11 U_LVDS_repeater12 U_LVDS_repeater13 U_LVDS_repeater14 U_LVDS_repeater15 U_LVDS_repeater16 U_LVDS_repeater17 U_LVDS_repeater18 U_LVDS_repeater19 U_LVDS_repeater20 U_LVDS_repeater21
component class U_LVDS_repeater10: C46J C47J D1J IC19J IC20J R131J R132J R133J T25J
component class U_LVDS_repeater9: C46I C47I D1I IC19I IC20I R131I R132I R133I T25I
component class U_LVDS_repeater8: C46H C47H D1H IC19H IC20H R131H R132H R133H T25H
component class U_LVDS_repeater6: C46F C47F D1F IC19F IC20F R131F R132F R133F T25F
component class U_LVDS_repeater5: C46E C47E D1E IC19E IC20E R131E R132E R133E T25E
component class U_LVDS_repeater4: C46D C47D D1D IC19D IC20D R131D R132D R133D T25D
component class U_LVDS_repeater3: C47C D1C IC20C R131C
component class U_LVDS_repeater7: C47G D1G IC20G R131G
component class U_LVDS_repeater1: C47A D1A IC20A R131A
component class Grabber: B1 B2 B3 B4 B5 B6 B7 B8 B9 B10 B11 B12 B13 B14 B15 B16 C1 C2 C3 C4 C5 C6 C7 C8 C11 C12 C58 C59 C62 C64 C65 C66 C67 C68 D2 D3 D4 FTG21 FTG22 FTG23 FTG24 IC1 IC2 IC3 IC4 IC24 IC26 IC27 J1 J2 J3 J4 J14 J24 L1 L2 LD1 LD5 LD6 LD7 LD8 R1 R2 R3 R4 R5 R6 R7 R8 R9 R10 R11 R36 R37 R121 R122 SCREW1 SCREW2 SCREW3 SCREW4
component class U_LVDS_repeater11: C47K D1K IC20K R131K
component class U_LVDS_repeater12: C47L D1L IC20L R131L
component class U_LVDS_repeater13: C47M D1M IC20M R131M
component class U_LVDS_repeater14: C47N D1N IC20N R131N
component class U_LVDS_repeater15: C47O D1O IC20O R131O
component class U_LVDS_repeater16: C47P D1P IC20P R131P
differential pair ZCLK: +ZCLK_P -ZCLK_N
differential pair Z3: +Z3_P -Z3_N
differential pair Z2: +Z2_P -Z2_N
differential pair Z1: +Z1_P -Z1_N
differential pair Z0: +Z0_P -Z0_N
differential pair LVDS20: +LVDS20_P -LVDS20_N
differential pair LVDS19: +LVDS19_P -LVDS19_N
differential pair LVDS18: +LVDS18_P -LVDS18_N
differential pair LVDS17: +LVDS17_P -LVDS17_N
differential pair LVDS16: +LVDS16_P -LVDS16_N
differential pair LVDS12: +LVDS12_P -LVDS12_N
differential pair LVDS11: +LVDS11_P -LVDS11_N
differential pair LVDS10: +LVDS10_P -LVDS10_N
differential pair LVDS9: +LVDS9_P -LVDS9_N
differential pair LVDS8: +LVDS8_P -LVDS8_N
differential pair LVDS4: +LVDS4_P -LVDS4_N
differential pair LVDS3: +LVDS3_P -LVDS3_N
differential pair LVDS2: +LVDS2_P -LVDS2_N
differential pair LVDS1: +LVDS1_P -LVDS1_N
differential pair LVDS0: +LVDS0_P -LVDS0_N
differential pair YCLK: +YCLK_P -YCLK_N
differential pair Y3: +Y3_P -Y3_N
differential pair Y2: +Y2_P -Y2_N
differential pair Y1: +Y1_P -Y1_N
differential pair Y0: +Y0_P -Y0_N
differential pair XCLK: +XCLK_P -XCLK_N
differential pair X3: +X3_P -X3_N
differential pair X2: +X2_P -X2_N
differential pair X1: +X1_P -X1_N
differential pair X0: +X0_P -X0_N
differential pair SERTX: +SERTX_P -SERTX_N
differential pair SERRX: +SERRX_P -SERRX_N
differential pair LVDS15: +LVDS15_P -LVDS15_N
differential pair CC0: +CC0_P -CC0_N
differential pair CC1: +CC1_P -CC1_N
differential pair CC2: +CC2_P -CC2_N
differential pair CC3: +CC3_P -CC3_N
differential pair LVDS6: +LVDS5_P -LVDS5_N
differential pair LVDS7: +LVDS6_P -LVDS6_N
differential pair LVDS8: +LVDS7_P -LVDS7_N
differential pair LVDS14: +LVDS13_P -LVDS13_N
differential pair LVDS15: +LVDS14_P -LVDS14_N

## Components (designator, comment, footprint, x,y, rotation, side; value= is the part's Value field where it differs from the comment)
B1 "Plated Hole" c130h60 9958,7131.11 r90 top
B2 "Plated Hole" c130h60 9960,7248 r90 top
B3 "Plated Hole" c130h60 9412.13,7108.36 r90 top
B4 "Plated Hole" c130h60 9414.07,7222.72 r90 top
B5 "Plated Hole" c130h60 8535.53,6445.53 r0 top
B6 "Plated Hole" c130h60 9140,7169.8 r0 top
B7 "Plated Hole" c130h60 8517.42,8346.71 r0 top
B8 "Plated Hole" c130h60 9681,7144 r0 top
B9 "Plated Hole" c130h60 8379.62,9744.35 r0 top
B10 "Plated Hole" c130h60 8356.98,6559 r0 top
B11 "Plated Hole" c130h60 8357.38,6434 r0 top
B12 "Plated Hole" MTG270_500 7746,9983 r0 top
B13 "Plated Hole" MTG270_500 7746,6483 r0 top
B14 "Plated Hole" c130h60 8867,7155.79 r0 top
B15 "Plated Hole" c130h60 8867,7264 r0 top
B16 "Plated Hole" c130h60 10217,7167 r0 top
C1 "Undefined" CAPC2012X135N 7948.48,9919.32 r0 top
C2 "Undefined" CAPC2012X135N 7936,6578.99 r0 top
C3 "100nF" CAPC1005X55N 9003,7111.47 r0 top
C4 "100nF" CAPC1005X55N 10046.72,6717 r0 top
C5 "100nF" CAPC1005X55N 9995,7009 r180 top
C6 "22uF" CAPC2012X135N 9999,6950 r180 top
C7 "22uF" CAPC2012X135N 10138.57,7028 r0 top
C8 "22uF" CAPC2012X135N 10137,6950 r0 top
C47A "100nF" CAPC1005X55N 8530.61,8682.06 r270 top (schematic designator C47)
C47B "100nF" CAPC1005X55N 8529.23,8879.86 r270 top (schematic designator C47)
C47C "100nF" CAPC1005X55N 8311.71,8972.38 r270 top (schematic designator C47)
C47D "100nF" CAPC1005X55N 8529.62,9070.8 r270 top (schematic designator C47)
C47E "100nF" CAPC1005X55N 8309.15,8782.42 r270 top (schematic designator C47)
C47F "100nF" CAPC1005X55N 8122.46,7021.87 r90 top (schematic designator C47)
C47G "100nF" CAPC1005X55N 8535.53,7134.78 r270 top (schematic designator C47)
C47H "100nF" CAPC1005X55N 8116.3,7219.31 r90 top (schematic designator C47)
C47I "100nF" CAPC1005X55N 8536.91,7347.1 r270 top (schematic designator C47)
C47J "100nF" CAPC1005X55N 8535.8,7549.19 r270 top (schematic designator C47)
C47K "100nF" CAPC1005X55N 8319.39,7449.78 r270 top (schematic designator C47)
C47L "100nF" CAPC1005X55N 8311.71,9169.23 r270 top (schematic designator C47)
C47M "100nF" CAPC1005X55N 8311.71,9366.35 r270 top (schematic designator C47)
C47N "100nF" CAPC1005X55N 8529.62,9464.5 r270 top (schematic designator C47)
C47O "100nF" CAPC1005X55N 8311.71,9562.93 r270 top (schematic designator C47)
C47P "100nF" CAPC1005X55N 8529.62,9267.65 r270 top (schematic designator C47)
C47Q "100nF" CAPC1005X55N 8318.01,7646.59 r270 top (schematic designator C47)
C47R "100nF" CAPC1005X55N 8319.39,7842.77 r270 top (schematic designator C47)
C47S "100nF" CAPC1005X55N 8538.87,7944.46 r270 top (schematic designator C47)
C47T "100nF" CAPC1005X55N 8318.01,8039.27 r270 top (schematic designator C47)
C47U "100nF" CAPC1005X55N 8538.88,7748.95 r270 top (schematic designator C47)
C58 "100nF" CAPC1005X55N 10094,7113 r0 top
C59 "100nF" CAPC1005X55N 8920.96,6601.63 r0 top
C62 "10uF" CAPAE430X540N 8166,9768 r0 top
C64 "100nF" CAPC1005X55N 9550,7093 r0 top
C65 "100nF" CAPC1005X55N 8921.32,6641.98 r0 top
C66 "22uF" CAPC2012X135N 8924,6450.05 r0 top
C67 "100nF" CAPC1005X55N 9393.4,6614.43 r0 top
C68 "22uF" CAPC2012X135N 9403.24,6506.16 r90 top
D1A "NUP4114UPXV6T1G" SOTFL50P160X60-6N 8419.39,8650.57 r0 bottom (schematic designator D1)
D1B "NUP4114UPXV6T1G" SOTFL50P160X60-6N 8418.01,8848.36 r0 bottom (schematic designator D1)
D1C "NUP4114UPXV6T1G" SOTFL50P160X60-6N 8200.49,8940.88 r0 bottom (schematic designator D1)
D1D "NUP4114UPXV6T1G" SOTFL50P160X60-6N 8418.4,9039.31 r0 bottom (schematic designator D1)
D1E "NUP4114UPXV6T1G" SOTFL50P160X60-6N 8197.93,8750.92 r0 bottom (schematic designator D1)
D1F "NUP4114UPXV6T1G" SOTFL50P160X60-6N 8233.68,7053.36 r180 bottom (schematic designator D1)
D1G "NUP4114UPXV6T1G" SOTFL50P160X60-6N 8424.31,7103.28 r0 bottom (schematic designator D1)
D1H "NUP4114UPXV6T1G" SOTFL50P160X60-6N 8233.68,7250.21 r180 bottom (schematic designator D1)
D1I "NUP4114UPXV6T1G" SOTFL50P160X60-6N 8425.69,7315.61 r0 bottom (schematic designator D1)
D1J "NUP4114UPXV6T1G" SOTFL50P160X60-6N 8424.58,7517.69 r0 bottom (schematic designator D1)
D1K "NUP4114UPXV6T1G" SOTFL50P160X60-6N 8208.17,7418.28 r0 bottom (schematic designator D1)
D1L "NUP4114UPXV6T1G" SOTFL50P160X60-6N 8200.49,9137.73 r0 bottom (schematic designator D1)
D1M "NUP4114UPXV6T1G" SOTFL50P160X60-6N 8200.49,9334.86 r0 bottom (schematic designator D1)
D1N "NUP4114UPXV6T1G" SOTFL50P160X60-6N 8418.4,9433.01 r0 bottom (schematic designator D1)
D1O "NUP4114UPXV6T1G" SOTFL50P160X60-6N 8200.49,9531.43 r0 bottom (schematic designator D1)
D1P "NUP4114UPXV6T1G" SOTFL50P160X60-6N 8418.4,9236.16 r0 bottom (schematic designator D1)
D1Q "NUP4114UPXV6T1G" SOTFL50P160X60-6N 8206.79,7615.09 r0 bottom (schematic designator D1)
D1R "NUP4114UPXV6T1G" SOTFL50P160X60-6N 8208.17,7811.28 r0 bottom (schematic designator D1)
D1S "NUP4114UPXV6T1G" SOTFL50P160X60-6N 8427.65,7912.97 r0 bottom (schematic designator D1)
D1T "NUP4114UPXV6T1G" SOTFL50P160X60-6N 8206.79,8007.77 r0 bottom (schematic designator D1)
D1U "NUP4114UPXV6T1G" SOTFL50P160X60-6N 8427.66,7717.46 r0 bottom (schematic designator D1)
D2 "PRTR5V0U2X" SOT190P230X110-4N 10071.27,7204 r90 bottom
D3 "PRTR5V0U2X" SOT190P230X110-4N 9534,7184.9 r90 bottom
D4 "PRTR5V0U2X" SOT190P230X110-4N 8987.27,7205 r90 bottom
FTG21 "Use only in PCB" FIDUCIAL_TOP_C100-200 7746,6686 r90 bottom
FTG22 "Use only in PCB" FIDUCIAL_TOP_S100-200 7746,6686 r90 top
FTG23 "Use only in PCB" FIDUCIAL_TOP_S200-400 9698.52,9724.66 r0 top
FTG24 "Use only in PCB" FIDUCIAL_TOP_S100-200 8109,9975 r90 bottom
IC1 "24AA02E48T-I/OT" SOT95P280X145-5N 9004,7205 r0 top
IC2 "AP62201WU-7" SOT95P280X100-6N 9990,6821 r270 top
IC3 "24AA02E48-I/SN" SOIC127P600X175-8N 9638,6939 r90 bottom
IC4 "24AA02E48-I/SN" SOIC127P600X175-8N 8957,6954.3 r90 bottom
IC20A "FIN1101K8X" SOP50P310X90-8N 8419.39,8647.61 r0 top (schematic designator IC20)
IC20B "FIN1101K8X" SOP50P310X90-8N 8418.01,8845.41 r0 top (schematic designator IC20)
IC20C "FIN1101K8X" SOP50P310X90-8N 8200.49,8937.93 r0 top (schematic designator IC20)
IC20D "FIN1101K8X" SOP50P310X90-8N 8418.4,9036.35 r0 top (schematic designator IC20)
IC20E "FIN1101K8X" SOP50P310X90-8N 8197.93,8747.97 r0 top (schematic designator IC20)
IC20F "FIN1101K8X" SOP50P310X90-8N 8233.68,7056.32 r180 top (schematic designator IC20)
IC20G "FIN1101K8X" SOP50P310X90-8N 8424.31,7100.33 r0 top (schematic designator IC20)
IC20H "FIN1101K8X" SOP50P310X90-8N 8233.68,7253.17 r180 top (schematic designator IC20)
IC20I "FIN1101K8X" SOP50P310X90-8N 8425.68,7312.65 r0 top (schematic designator IC20)
IC20J "FIN1101K8X" SOP50P310X90-8N 8424.58,7514.74 r0 top (schematic designator IC20)
IC20K "FIN1101K8X" SOP50P310X90-8N 8208.17,7415.33 r0 top (schematic designator IC20)
IC20L "FIN1101K8X" SOP50P310X90-8N 8200.49,9134.78 r0 top (schematic designator IC20)
IC20M "FIN1101K8X" SOP50P310X90-8N 8200.49,9331.91 r0 top (schematic designator IC20)
IC20N "FIN1101K8X" SOP50P310X90-8N 8418.4,9430.06 r0 top (schematic designator IC20)
IC20O "FIN1101K8X" SOP50P310X90-8N 8200.49,9528.48 r0 top (schematic designator IC20)
IC20P "FIN1101K8X" SOP50P310X90-8N 8418.4,9233.2 r0 top (schematic designator IC20)
IC20Q "FIN1101K8X" SOP50P310X90-8N 8206.79,7612.14 r0 top (schematic designator IC20)
IC20R "FIN1101K8X" SOP50P310X90-8N 8208.17,7808.32 r0 top (schematic designator IC20)
IC20S "FIN1101K8X" SOP50P310X90-8N 8427.65,7910.02 r0 top (schematic designator IC20)
IC20T "FIN1101K8X" SOP50P310X90-8N 8206.79,8004.82 r0 top (schematic designator IC20)
IC20U "FIN1101K8X" SOP50P310X90-8N 8427.66,7714.5 r0 top (schematic designator IC20)
IC24 "24AA02E48T-I/OT" SOT95P280X145-5N 10088,7204 r0 top
IC26 "24AA02E48T-I/OT" SOT95P280X145-5N 9550.73,7184.9 r0 top
IC27 "TPS62175DQC" SON50P200X300X80-11N-R94X250 9275.29,6486.47 r180 top
J1 "MDR 26" 3M_N10226-5212PC 7742.97,7470.72 r90 top locked
J2 "MDR 26" 3M_N10226-5212PC 7739.23,9124.27 r90 top locked
J3 "" 3M_N2530-6002RB 9084,8199 r270 top locked
J14 "" 3M_N2530-6002RB 10194,8199 r270 top locked
J24 "" 3M_N2530-6002RB 9639,8199 r270 top locked
L1 "3.3uH" IND_WURTH_WE-TPC_4828 10195,6780 r90 top
L2 "10uH" IND_MURATA-PS_8400 9091,6503 r270 top
LD1 "Green" LED_KINGBRIGHT_KPH-1608CGCK 10296,7202 r90 top
LD5 "Green" LED_KINGBRIGHT_KPH-1608CGCK 8143.4,6427.42 r0 top
LD6 "Green" LED_KINGBRIGHT_KPH-1608CGCK 8138,6562 r0 top
LD7 "Green" LED_KINGBRIGHT_KPH-1608CGCK 9217,7210 r90 top
LD8 "Green" LED_KINGBRIGHT_KPH-1608CGCK 9759.97,7191 r90 top
R1 "10k" RESC1005X40N 8270.17,6427.42 r0 top
R2 "470" RESC1005X40N 8249.43,6562 r180 top
R3 "470" RESC1005X40N 9128,7251.56 r0 top
R4 "470" RESC1005X40N 9682,7225.05 r0 top
R5 "0" RESC1608X55N 7949.34,9996 r180 top
R6 "0" RESC1608X55N 7936,6502.22 r180 top
R7 "470" RESC1005X40N 10220,7245.34 r0 top
R8 "100" RESC1005X40N 8073,9537 r270 top
R9 "100" RESC1005X40N 8428.24,7010 r180 top
R10 "31k6" RESC1005X35N 9897,6718 r180 top
R11 "10k" RESC1005X40N 9969.5,6718 r180 top
R121 "270k" RESC1608X55N 9048.91,6653.8 r180 top
R122 "82k" RESC1608X55N 9275.29,6594.74 r0 top
R131A "100" RESC1005X40N 8415.25,8718.48 r0 top (schematic designator R131)
R131B "100" RESC1005X40N 8413.87,8916.28 r0 top (schematic designator R131)
R131C "100" RESC1005X40N 8196.35,9008.8 r0 top (schematic designator R131)
R131D "100" RESC1005X40N 8414.27,9107.22 r0 top (schematic designator R131)
R131E "100" RESC1005X40N 8193.8,8818.83 r0 top (schematic designator R131)
R131F "100" RESC1005X40N 8237.81,6985.45 r180 top (schematic designator R131)
R131G "100" RESC1005X40N 8420.17,7171.2 r0 top (schematic designator R131)
R131H "100" RESC1005X40N 8237.81,7182.3 r180 top (schematic designator R131)
R131I "100" RESC1005X40N 8421.55,7383.52 r0 top (schematic designator R131)
R131J "100" RESC1005X40N 8420.45,7585.61 r0 top (schematic designator R131)
R131K "100" RESC1005X40N 8204.03,7486.2 r0 top (schematic designator R131)
R131L "100" RESC1005X40N 8196.35,9205.65 r0 top (schematic designator R131)
R131M "100" RESC1005X40N 8196.35,9402.77 r0 top (schematic designator R131)
R131N "100" RESC1005X40N 8414.27,9500.92 r0 top (schematic designator R131)
R131O "100" RESC1005X40N 8196.35,9599.35 r0 top (schematic designator R131)
R131P "100" RESC1005X40N 8414.27,9304.07 r0 top (schematic designator R131)
R131Q "100" RESC1005X40N 8202.65,7683.01 r0 top (schematic designator R131)
R131R "100" RESC1005X40N 8204.03,7879.19 r0 top (schematic designator R131)
R131S "100" RESC1005X40N 8423.52,7980.88 r0 top (schematic designator R131)
R131T "100" RESC1005X40N 8202.65,8075.69 r0 top (schematic designator R131)
R131U "100" RESC1005X40N 8423.52,7785.37 r0 top (schematic designator R131)
SCREW1 "3341-31" 3M_3341-31 7517.97,6855.72 r180 top
SCREW2 "3341-31" 3M_3341-31 7517.97,8085.53 r180 top
SCREW3 "3341-31" 3M_3341-31 7514.23,8509.27 r180 top
SCREW4 "3341-31" 3M_3341-31 7514.23,9744.35 r180 top

## Footprints (in the part's own frame and the unit in brackets; to place one, negate y for a bottom-side part, rotate by r counter-clockwise, add the part's x,y. Pads: shape width x height; smd on the part's side, far side on the other; paste and mask are expansions set on the pad)
3M_3341-31 [mil] "MDR Female Screw Locks : Thread Length= 3.8mm, Thread Size: M2.5"
  silkscreen extent -159,-108 207,108, body extent -355,-108 207,108, height 94
3M_N2530-6002RB [mm] "30 Contacts - Straight .100\" x .100\" Low Profile Four-Wall Header"
  round 1.6 hole 1: 1(-17.78,-1.27) 2(-17.78,1.27) 3(-15.24,-1.27) 4(-15.24,1.27) 5(-12.7,-1.27) 6(-12.7,1.27) 7(-10.16,-1.27) 8(-10.16,1.27) 9(-7.62,-1.27) 10(-7.62,1.27) 11(-5.08,-1.27) 12(-5.08,1.27) 13(-2.54,-1.27) 14(-2.54,1.27) 15(0,-1.27) 16(0,1.27) 17(2.54,-1.27) 18(2.54,1.27) 19(5.08,-1.27) 20(5.08,1.27) 21(7.62,-1.27) 22(7.62,1.27) 23(10.16,-1.27) 24(10.16,1.27) 25(12.7,-1.27) 26(12.7,1.27) 27(15.24,-1.27) 28(15.24,1.27) 29(17.78,-1.27) 30(17.78,1.27)
  silkscreen extent -22.71,-4.85 22.71,4.52, body extent -22.71,-4.11 22.71,4.52, height 9.91
3M_N10226-5212PC [mm] "26 contacts, Mini D Ribbon (MDR), 102 Series, .050\" Boardmount Through-hole Right Angle Receptacle-Shielded"
  round 1.4 hole 0.8: 1(-7.62,-4.826) 2(-6.35,-2.921) 3(-5.08,-4.826) 4(-3.81,-2.921) 5(-2.54,-4.826) 6(-1.27,-2.921) 7(0,-4.826) 8(1.27,-2.921) 9(2.54,-4.826) 10(3.81,-2.921) 11(5.08,-4.826) 12(6.35,-2.921) 13(7.62,-4.826) 14(-7.62,-1.016) 15(-6.35,0.889) 16(-5.08,-1.016) 17(-3.81,0.889) 18(-2.54,-1.016) 19(-1.27,0.889) 20(0,-1.016) 21(1.27,0.889) 22(2.54,-1.016) 23(3.81,0.889) 24(5.08,-1.016) 25(6.35,0.889) 26(7.62,-1.016)
  round 5.5 hole 2.8: 27(-15.621,-2.921) 28(15.621,-2.921)
  silkscreen extent -18.54,-6.5 18.54,11.05, body extent -18.54,-5.71 18.54,11.05, height 9.4
c130h60 [mm] "Plated Through Hole: Hole Dia.=0.6mm Pad Dia.=1.30mm"
  round 1.3 hole 0.6: 1(0,0)
  silkscreen extent -1,-1 1,1
CAPAE430X540N [mm] "Capacitor, Aluminium Electrolytric, 4.3mm L X 4.3mm W X 5.4mm H, IPC Medium Density"
  rect 2.55x1.6 smd: 1(-1.75,0) 2(1.75,0)
  silkscreen extent -2.8,-2.15 2.15,2.15, body extent -2.75,-2.25 2.75,2.25, height 5.7
CAPC1005X55N [mm] "Chip Capacitor, Body 1.0x0.55mm, IPC Medium Density"
  rect 0.62x0.62 smd: 1(-0.45,0) 2(0.45,0)
  body extent -0.52,-0.27 0.53,0.28, height 0.55
CAPC2012X135N [mm] "Chip Capacitor, Body 2.0x1.25mm, IPC Medium Density"
  rect 1.05x1.4 smd: 1(-0.9,0) 2(0.9,0)
  silkscreen extent 0,-0.58 0,0.58, body extent -1.05,-0.67 1.05,0.68, height 1.25
FIDUCIAL_TOP_C100-200 [mm] "Round Fiducial Target, Top Layer, 1.0mm, Top Solder 2.0mm, Keepout =2.0mm"
  round 1 smd paste-0.51 mask+0.5: FTG2(0,0)
  TopLayer keep-out circle w0.1: c0,0 r1
FIDUCIAL_TOP_S100-200 [mm] "Square Fiducial Target, Top Layer, 1.0mm, Top Solder 2.0mm, Keepout =2.0mm"
  rect 1x1 smd rot 45 paste-0.51 mask+0.5: 1(0,0)
  TopLayer keep-out region: 1.414,0 0,-1.414 -1.414,0 0,1.414
FIDUCIAL_TOP_S200-400 [mm] "Square Fiducial Target, Top Layer, 2.0mm, Top Solder 4.0mm, Keepout =4.0mm"
  rect 2x2 smd rot 45 paste-0.9 mask+1: 1(0,0)
  TopLayer keep-out region: -2.839,0.011 -0.011,2.839 2.818,0.011 -0.011,-2.818
IND_MURATA-PS_8400 [mm] "Miniature Surface Mount Power Inductors, 4.5mm L X 3.3mm W X 2.9mm H, MURATA 8400 Series"
  rect 2x3.5 smd: 1(-1.6,0) 2(1.6,0)
  silkscreen extent -0.3,-1.8 0.3,1.8, body extent -2.4,-1.8 2.4,1.8, height 2.9
IND_WURTH_WE-TPC_4828 [mm] "Shielded Tiny Power Inductor, Body 4.8x4.8mm"
  rect 0.95x5.3 smd: 1(-2.275,0) 2(2.275,0)
  rect 1.05x1.014 smd: 1(-1.275,2.143) 1(-1.275,-2.143) 2(1.275,2.143) 2(1.275,-2.143)
  TopLayer region: 0.75,-2.65 2.75,-2.65 2.75,2.65 0.75,2.65 0.75,1.636 1.394,1.138 1.753,0.407 1.753,-0.407 1.394,-1.138 0.75,-1.636 0.75,-1.636
  TopLayer region: -2.75,-2.65 -0.75,-2.65 -0.75,-1.636 -1.394,-1.138 -1.753,-0.407 -1.753,0.407 -1.394,1.138 -0.75,1.636 -0.75,1.636 -0.75,2.65 -2.75,2.65
  TopLayer region: 2.75,-2.65 0.75,-2.65 0.75,-1.636 1.394,-1.138 1.753,-0.407 1.753,0.407 1.394,1.138 0.75,1.636 0.75,1.636 0.75,2.65 2.75,2.65
  silkscreen extent -0.35,-2.4 0.35,2.4, body extent -2.4,-2.4 2.4,2.4, height 2.8
LED_KINGBRIGHT_KPH-1608CGCK [mm] "SMT Green LED, Case 0603, Body L 1.6 x W 0.8mm H 0.65mm"
  rect 0.8x0.8 smd: 1(-0.825,0) 2(0.825,0)
  silkscreen extent -1.82,-0.4 0.08,0.4, body extent -0.8,-0.4 0.8,0.4, height 0.65
MTG270_500 [mm] "Plated Through Hole: Hole Dia.=2.7mm Pad Dia.=5.0mm"
  round 5 hole 2.7: 1(0,0)
RESC1005X35N [mm] "Chip Resistor, EIA 0402, Metric 1005, Body 1.0x0.5mm, IPC Medium Density"
  rect 0.58x0.62 smd: 1(-0.47,0) 2(0.47,0)
  body extent -0.52,-0.27 0.53,0.28, height 0.35
RESC1005X40N [mm] "Chip Resistor, EIA 0402, Metric 1005, Body 1.0x0.5mm, IPC Medium Density"
  rect 0.58x0.62 smd: 1(-0.47,0) 2(0.47,0)
  body extent -0.52,-0.27 0.53,0.28, height 0.4
RESC1608X55N [mm] "Chip Resistor, EIA 0603, Metric 1608, Body 1.6x0.8mm, IPC Medium Density"
  rect 0.9x1 smd: 1(-0.8,0) 2(0.8,0)
  body extent -0.87,-0.47 0.88,0.48, height 0.55
SOIC127P600X175-8N [mm] "SOIC 8, Pitch 1.27mm - Body 4x5mm, IPC Medium Density"
  rect 1.55x0.6 smd: 1(-2.7,1.905) 2(-2.7,0.635) 3(-2.7,-0.635) 4(-2.7,-1.905) 5(2.7,-1.905) 6(2.7,-0.635) 7(2.7,0.635) 8(2.7,1.905)
  silkscreen extent -2.52,-2.5 1.55,2.88, body extent -3.1,-2.5 3.1,2.5, height 1.75
SON50P200X300X80-11N-R94X250 [mm] "SON, 10-Leads, Body 2x3mm, Pitch 0.5mm, Thermal Pad 0.94x2.5mm, IPC Medium Density"
  rect 0.7x0.3 smd: 1(-1.05,1) 2(-1.05,0.5) 3(-1.05,0) 4(-1.05,-0.5) 5(-1.05,-1) 6(1.05,-1) 7(1.05,-0.5) 8(1.05,0) 9(1.05,0.5) 10(1.05,1)
  rect 0.94x2.5 smd: 11(0,0)
  silkscreen extent -1.5,-1.55 1.05,1.6, body extent -1.05,-1.55 1.05,1.55, height 0.8
SOP50P310X90-8N [mm] "SOP, 0.50mm pitch; 8 pin, 2.30mm W X 2.00mm L X 0.90mm H body, PC Medium Density"
  rect 0.85x0.3 smd: 1(-1.55,0.75) 2(-1.55,0.25) 3(-1.55,-0.25) 4(-1.55,-0.75) 5(1.55,-0.75) 6(1.55,-0.25) 7(1.55,0.25) 8(1.55,0.75)
  silkscreen extent -1.82,-1 0.8,1.52, body extent -1.62,-1 1.62,1, height 0.9
SOT95P280X100-6N [mm] "SOT23, 0.95mm pitch; 6 pin, 1.625mm W X 2.90mm L X 1.00mm H body, IPC Medium Density"
  rect 1.1x0.55 smd: 1(-1.35,0.95) 2(-1.35,0) 3(-1.35,-0.95) 4(1.35,-0.95) 5(1.35,0) 6(1.35,0.95)
  silkscreen extent -1.77,-1.45 0.48,1.88, body extent -1.4,-1.5 1.4,1.5, height 1
SOT95P280X145-5N [mm] "SOT, 0.95mm pitch; 5 pin, 1.60mm W X 2.90mm L X 1.45mm H body, IPC Medium Density"
  rect 1.1x0.6 smd: 1(-1.3,0.95) 2(-1.3,0) 3(-1.3,-0.95) 4(1.3,-0.95) 5(1.3,0.95)
  silkscreen extent -1.72,-1.45 0.43,1.87, body extent -1.4,-1.5 1.4,1.5, height 1.45
SOT190P230X110-4N [mm] "SOT143, SOT, 1.90mm Pitch; 4 Pin, 1.30mm W X 2.90mm L X 1.10mm H body, IPC Medium Density"
  rect 1x1 smd: 1(-1.15,0.75)
  rect 1x0.6 smd: 2(-1.15,-0.95) 3(1.15,-0.95) 4(1.15,0.95)
  silkscreen extent -1.52,-1.45 0.33,1.88, body extent -1.25,-1.5 1.25,1.5, height 1.1
SOTFL50P160X60-6N [mm] "SOTFL (SOT666), 0.50mm, Pitch; 6 Pin, 1.20mm W X 1.60mm L X 0.60mm H Body, IPC Medium Density"
  rect 0.57x0.3 smd: 1(-0.79,0.5) 2(-0.79,0) 3(-0.79,-0.5) 4(0.79,-0.5) 5(0.79,0) 6(0.79,0.5)
  silkscreen extent -1.22,-0.8 0,1.27, body extent -0.85,-0.85 0.85,0.85, height 0.6

## Part data
B1 B2 B3 B4 B5 B6 B7 B8 B9 B10 B11 B14 B15 B16: library part PLATED_HOLE0.6_PAD1.3, "Single Terminal Socket", Author="CERN DEM MR", ComponentHeight=0mm, Component Type="Standard (No BOM)", CreateDate=02.03.2016, Family="Plated Hole", HelpURL=Undefined, LatestRevisionDate=02.03.2016, Mounted=No, PackageDescription="Plated Through Hole: Hole Dia.=0.6mm Pad Dia.=1.3mm", Part Description="Plated Through Hole: Hole Dia.=0.6mm Pad Dia.=1.3mm", Part Number=PLATED_HOLE0.6_PAD1.3, Pin Count=1, Sense=No, SMD=No, Socket=No, Status=None
B12 B13: library part PLATED_HOLE2.7_PAD5.0, "Single Terminal Socket", Author="CERN DEM JMW", ComponentHeight=0mm, Component Type="Standard (No BOM)", CreateDate=27.09.2011, Family="Plated Hole", HelpURL=Undefined, LatestRevisionDate=27.09.2011, Mounted=No, PackageDescription="Plated Through Hole: Hole Dia.=2.7mm Pad Dia.=5.0mm", Part Description="Plated Through Hole: Hole Dia.=2.7mm Pad Dia.=5.0mm", Part Number=PLATED_HOLE2.7_PAD5.0, Pin Count=1, Sense=No, SMD=No, Socket=No, Status=None
C1 C2: library part CC0805_NO-VALUE, "Non-polarised capacitor", Case=0805, Manufacturer1 ComponentHeight=1.35mm, Author="CERN DEM JLC", Component Type=Standard, CreateDate=10.12.2008, HelpURL=Undefined, LatestRevisionDate=11.09.2013, Manufacturer=Undefined, Manufacturer Part Number=CC0805_NO-VALUE, Mounted=No, Part Description="Reserved Footprint For 0805(2012) Chip Ceramic Capacitor", Part Number=CC0805_NO-VALUE, Pin Count=2, Sense=No, SMD=Yes, Socket=No, Status=None
C3 C4 C5 C47A C47B C47C C47D C47E C47F C47G C47H C47I C47J C47K C47L C47M C47N C47O C47P C47Q C47R C47S C47T C47U C58 C59 C64 C65 C67: library part CC0402_100NF_16V_10%_X5R, "Non-polarised capacitor", Case=0402, Manufacturer=GENERIC, Manufacturer1 ComponentHeight=0.55mm, Manufacturer1 Example=MURATA, Manufacturer1 Part Number=GRM155R61C104KA88D, Tolerance=±10%, Voltage=16V, Author="CERN DEM JLC", Component Type=Standard, CreateDate=10.12.2013, HelpURL=\\cern.ch\dfs\Applications\Altium\Datasheets\CC0402_X5R_MURATA_GRM.pdf, LatestRevisionDate=10.12.2013, Manufacturer Part Number=CC0402_100NF_16V_10%_X5R, Mounted=Yes, Part Description="SMD Multilayer Chip Ceramic Capacitor", Part Number=CC0402_100NF_16V_10%_X5R, Pin Count=2, Sense=No, SMD=Yes, Socket=No, Status=None, TC=X5R
C6 C7 C8 C66 C68: library part CC0805_22UF_16V_10%_X5R, "Non-polarised capacitor", Case=0805, Manufacturer=GENERIC, Manufacturer1 ComponentHeight=1.35mm, Manufacturer1 Example=TDK, Manufacturer1 Part Number=C2012X5R1C226KT, Tolerance=±10%, Voltage=16V, Author="CERN DEM JLC", Component Type=Standard, CreateDate=25.10.2012, HelpURL=\\cern.ch\dfs\Applications\Altium\Datasheets\CC0805_X5R_TDK_C.pdf, LatestRevisionDate=25.10.2012, Manufacturer Part Number=CC0805_22UF_16V_10%_X5R, Mounted=Yes, Part Description="SMD Multilayer Chip Ceramic Capacitor", Part Number=CC0805_22UF_16V_10%_X5R, Pin Count=2, Sense=No, SMD=Yes, Socket=No, Status=Preferred, TC=X5R
C62: library part CAE430-540_10UF_16V_20%, "Polarised capacitor", Case=B, Manufacturer=PANASONIC, Manufacturer Part Number=EEEFK1C100AR, Tolerance=±20%, Voltage=16V, Author="CERN DEM JLC", ComponentHeight=5.8mm, Component Type=Standard, CreateDate=03.12.2007, HelpURL=\\cern.ch\dfs\Applications\Altium\Datasheets\CAE_PANASONIC_FK.pdf, LatestRevisionDate=05.11.2014, Mounted=Yes, Part Description="Aluminum Electrolytic SMT Capacitor", Part Number=CAE430-540_10UF_16V_20%, Pin Count=2, Sense=No, SMD=Yes, Socket=No, Status="Not Recommended"
D1A D1B D1C D1D D1E D1F D1G D1H D1I D1J D1K D1L D1M D1N D1O D1P D1Q D1R D1S D1T D1U: Manufacturer="ON SEMICONDUCTOR", Voltage=5.5V, Author="CERN DEM JLC", Bonding=No, ComponentHeight=1.75mm, Component Type=Standard, CreateDate=05.12.2012, Device=NUP4114UPXV6T1G, HelpURL=\\cern.ch\dfs\Applications\Altium\Datasheets\NUP4114UPXV6T1G.pdf, LatestRevisionDate=05.12.2012, Manufacturer Part Number=NUP4114UPXV6T1G, Mounted=Yes, PackageDescription="SOTFL (SOT666, SOT563,), 0.50mm, Pitch; 6 Pin, 1.20mm W X 1.60mm L X 0.60mm H Body, IPC Medium Density", Part Description="ESD Protection Diodes Array (8kV) with Low Clamping Voltage", Part Number=NUP4114UPXV6T1G, Pin Count=8, PressFit=No, Sense=No, SMD=Yes, Socket=No
D2 D3 D4: "Ultra Low Capacitance Double Rail-to-Rail ESD Protection Diode", Case=SOT143B, Manufacturer="NXP SEMICONDUCTORS", Voltage=5.5V, Author="CERN DEM JLC", Bonding=No, Component Type=Standard, ComponentHeight=1.1mm, CreateDate=22.03.2011, Device=PRTR5V0U2X, HelpURL=\\cern.ch\dfs\Applications\Altium\Datasheets\PRTR5V0U2X.pdf, LatestRevisionDate=22.03.2011, Manufacturer Part Number=PRTR5V0U2X, Mounted=Yes, PackageDescription="SOT143B, SOT, 1.90mm Pitch; 4 Pin, 1.30mm W X 2.90mm L X 1.10mm H body, IPC Medium Density", Part Description="Ultra Low Capacitance (1pF) Double Rail-to-Rail ESD Protection Diode (8kV)", Part Number=PRTR5V0U2X, Pin Count=4, PressFit=No, Sense=No, SMD=Yes, Socket=No
FTG21: library part FIDUCIAL_TARGET_C100-200, "Fiducial Target", Author="CERN DEM JLC", ComponentHeight=0mm, Component Type="Standard (No BOM)", CreateDate=09.02.2010, Family=Fiducial, HelpURL=Undefined, LatestRevisionDate=04.04.2012, Mounted=No, PackageDescription="Round Fiducial Target, Top Layer, 1.0mm, Top Solder 2.0mm, Keepout =2.0mm", Part Description="Round Fiducial Target, Top Layer, 1.0mm, Top Solder 2.0mm, Keepout =2.0mm", Part Number=FIDUCIAL_TARGET_C100-200, Pin Count=1, Sense=No, SMD=Yes, Socket=No, Status=None
FTG22 FTG24: library part FIDUCIAL_TARGET_S100-200, "Fiducial Target", Author="CERN DEM JLC", ComponentHeight=0mm, Component Type="Standard (No BOM)", CreateDate=09.02.2010, Family=Fiducial, HelpURL=Undefined, LatestRevisionDate=04.04.2012, Mounted=No, PackageDescription="Square Fiducial Target, Top Layer, 1.0mm, Top Solder 2.0mm, Keepout =2.0mm", Part Description="Square Fiducial Target, Top Layer, 1.0mm, Top Solder 2.0mm, Keepout =2.0mm", Part Number=FIDUCIAL_TARGET_S100-200, Pin Count=1, Sense=No, SMD=Yes, Socket=No, Status=None
FTG23: library part FIDUCIAL_TARGET_S200-400, "Fiducial Target", Author="CERN DEM JLC", ComponentHeight=0mm, Component Type="Standard (No BOM)", CreateDate=02.06.2008, Family=Fiducial, HelpURL=Undefined, LatestRevisionDate=04.04.2012, Mounted=No, PackageDescription="Square Fiducial Target, Top Layer, 2.0mm, Top Solder 4.0mm, Keepout =4.0mm", Part Description="Square Fiducial Target, Top Layer, 2.0mm, Top Solder 4.0mm, Keepout =4.0mm", Part Number=FIDUCIAL_TARGET_S200-400, Pin Count=1, Sense=No, SMD=Yes, Socket=No, Status=None
IC1 IC24 IC26: "1.7V-5.5V, 2K I2C Serial EEPROM With EUI-48 Node Identity", Case=SOT23-5, Manufacturer="MICROCHIP TECHNOLOGY", Author="CERN DEM MR", Bonding=No, ComponentHeight=1.45mm, Component Type=Standard, CreateDate=31.03.2016, Device=24AA02E48T-I/OT, HelpURL=\\cern.ch\dfs\Applications\Altium\Datasheets\24AA02E48T-I-OT.pdf, LatestRevisionDate=31.03.2016, Manufacturer Part Number=24AA02E48T-I/OT, Mounted=Yes, PackageDescription="SOT, 0.95mm pitch; 5 pin, 1.60mm W X 2.90mm L X 1.45mm H body, IPC Medium Density", Part Description="1.7V-5.5V, 2K I2C Serial EEPROM With EUI-48 Node Identity", Part Number=24AA02E48T-I/OT, Pin Count=5, PressFit=No, Sense=No, SMD=Yes, Socket=No
IC2: "4.2V TO 18V INPUT, 2A LOW IQ SYNCHRONOUS BUCK CONVERTER", Case=SOT23-6, Manufacturer="DIODES INCORPORATED", Author="CERN DEM HF", Bonding=No, Component Type=Standard, ComponentHeight=1.1mm, CreateDate=07.01.2022, Device=AP62201WU-7, HelpURL=\\cern.ch\dfs\Applications\Altium\Datasheets\AP6220x.pdf, LatestRevisionDate=07.01.2022, Manufacturer Part Number=AP62201WU-7, Mounted=Yes, PackageDescription="SOT23, 0.95mm Pitch; 6 Pin, 1.625mm W X 2.90mm L X 1.00mm H body, IPC Medium Density", Part Description="4.2V TO 18V INPUT, 2A LOW IQ SYNCHRONOUS BUCK CONVERTER", Part Number=AP62201WU-7, Pin Count=6, PressFit=No, Sense=No, SMD=Yes, Socket=No
IC3 IC4: library part MEM_24AA02E48-I/SN, "1.7V-5.5V, 2K I2C™ Serial EEPROMs with EUI-48™ Node Identity", Case=SOIC8, Manufacturer="MICROCHIP TECHNOLOGY", Author="CERN DEM MR", Bonding=No, Component Type=Standard, ComponentHeight=1.75mm, CreateDate=19.07.2016, Device=24AA02E48-I/SN, HelpURL=\\cern.ch\dfs\Applications\Altium\Datasheets\24AA025E48-I-SN.pdf, LatestRevisionDate=19.07.2016, Manufacturer Part Number=24AA02E48-I/SN, Mounted=Yes, PackageDescription="SOIC, 1.27mm Pitch; 8 Pin - Body 4x5mm, IPC Medium Density", Part Description="1.7V-5.5V, 2K I2C™ Serial EEPROMs with EUI-48™ Node Identity", Part Number=24AA02E48-I/SN, Pin Count=8, PressFit=No, Sense=No, SMD=Yes, Socket=No
IC20A IC20B IC20C IC20D IC20E IC20F IC20G IC20H IC20I IC20J IC20K IC20L IC20M IC20N IC20O IC20P IC20Q IC20R IC20S IC20T IC20U: "LVDS Single Port High Speed Repeater", Case=TSSOP8, Manufacturer="FAIRCHILD SEMICONDUCTOR", Author="CERN DEM JLC", Bonding=No, ComponentHeight=0.8mm, Component Type=Standard, CreateDate=08.11.2016, Device=FIN1101K8X, HelpURL=\\cern.ch\dfs\Applications\Altium\Datasheets\FIN1101K8X.pdf, LatestRevisionDate=08.11.2016, Manufacturer Part Number=FIN1101K8X, Mounted=Yes, PackageDescription="SOP, 0.50mm Pitch; 8 pin, 2.30mm W X 2.00mm L X 0.90mm H body, PC Medium Density", Part Description="LVDS Single Port High Speed Repeater", Part Number=FIN1101K8X, Pin Count=8, PressFit=No, Sense=No, SMD=Yes, Socket=No
IC27: "4.75-28VDC to 1-6VDC, 500mA Step-Down Converter With Sleep Mode", Case=SON10, Manufacturer="TEXAS INSTRUMENTS", Author="CERN DEM JMW", Bonding=No, ComponentHeight=0.8mm, Component Type=Standard, CreateDate=11.08.2015, Device=TPS62175DQC, HelpURL=\\cern.ch\dfs\Applications\Altium\Datasheets\TPS62175DQC.pdf, LatestRevisionDate=11.08.2015, Manufacturer Part Number=TPS62175DQC, Mounted=Yes, PackageDescription="SON, 10-Leads, Body 2x3mm, Pitch 0.5mm, Thermal Pad 0.94x2.5mm, IPC Medium Density", Part Description="4.75-28VDC to 1-6VDC, 500mA Step-Down Converter With Sleep Mode", Part Number=TPS62175DQC, Pin Count=11, PressFit=No, Sense=No, SMD=Yes, Socket=No
J1 J2: library part 3M_N10226-5212PC, "Connector Mini D Ribbon (MDR) 26 Female", Manufacturer=3M, Manufacturer Part Number=N10226-5212PC, Author="CERN DEM JLC", ComponentHeight=9.4mm, Component Type=Standard, CreateDate=18.11.2008, Family="MDR 26", HelpURL=\\cern.ch\dfs\Applications\Altium\Datasheets\3M_N10226-5212PC.pdf, LatestRevisionDate=14.10.2009, Mounted=Yes, Part Description="26 contacts, Mini D Ribbon (MDR), .050\" Boardmount Through-hole Right Angle Receptacle-Shielded, Diecast Body, 102 Series", Part Number=3M_N10226-5212PC, Pin Count=28, PressFit=No, Sense=No, SMD=No, Socket=No, Status=None
J3 J14 J24: library part 3M_N2530-6002RB, "Connector 30 Male", Manufacturer=3M, Manufacturer Part Number=N2530-6002RB, Author="CERN DEM JLC", ComponentHeight=10.03mm, Component Type=Standard, CreateDate=11.02.2009, Family="Header 30", HelpURL=\\cern.ch\dfs\Applications\Altium\Datasheets\3M_N2530-6002RB.pdf, LatestRevisionDate=11.08.2009, Mounted=Yes, Part Description="30 Contacts - Straight .100'' x .100'' Low Profile Four-Wall Header, 2500 Series", Part Number=3M_N2530-6002RB, Pin Count=30, PressFit=No, Sense=No, SMD=No, Socket=No, Status=None
L1: library part IND_3.3UH_30%_WURTH_WE-TPC_744043003, "Inductor With Core", Manufacturer="WURTH ELEKTRONIK", Manufacturer Part Number=744043003, Power=2.15A, Resistance=0.03R, Tolerance=±30%, Author="CERN DEM JLC", Component Type=Standard, ComponentHeight=3mm, CreateDate=12.07.2011, HelpURL=\\cern.ch\dfs\Applications\Altium\Datasheets\IND_WURTH_WE-TPC_744043003.pdf, LatestRevisionDate=24.01.2012, Mounted=Yes, Part Description="Shielded Tiny Power Inductor (WE-TPC Serie)", Part Number=IND_3.3UH_30%_WURTH_WE-TPC_744043003, Pin Count=2, Sense=No, SMD=Yes, Socket=No
L2: library part IND_10UH_10%_MURATA-PS_8400, "Inductor With Core", Manufacturer="MURATA POWER SOLUTIONS", Manufacturer Part Number=84103C, Power=950mA, Resistance=0.24R, Tolerance=±10%, Author="CERN DEM JLC", ComponentHeight=2.9mm, Component Type=Standard, CreateDate=02.07.2012, HelpURL=\\cern.ch\dfs\Applications\Altium\Datasheets\IND_MURATA-PS_8400.pdf, LatestRevisionDate=02.07.2012, Mounted=Yes, Part Description="Miniature Surface Mount Power Inductor (8400 Serie)", Part Number=IND_10UH_10%_MURATA-PS_8400, Pin Count=2, Sense=No, SMD=Yes, Socket=No, Status=None
LD1 LD5 LD6 LD7 LD8: library part LED_KINGBRIGHT_KPH-1608CGCK, "LED Green 1C 2A", Manufacturer=KINGBRIGHT, Manufacturer Part Number=KPH-1608CGCK, Author="CERN DEM JLC", Bonding=No, Color=Green, ComponentHeight=0.65mm, Component Type=Standard, CreateDate=03.07.2017, HelpURL=\\cern.ch\dfs\Applications\Altium\Datasheets\LED_KINGBRIGHT_KPH-1608CGCK.pdf, LatestRevisionDate=03.07.2017, Mounted=Yes, PackageDescription="SMT Green LED, Case 0603, Body L 1.6 x W 0.8mm H 0.65mm", Part Description="SMD Green LED, Case 1.6mmX0.8mm(0603), 0.65mm Thickness", Part Number=LED_KINGBRIGHT_KPH-1608CGCK, Pin Count=2, PressFit=No, Sense=No, SMD=Yes, Socket=No
R1 R11: library part R0402_10K_1%_0.0625W_100PPM, "Resistor - 1%", Case=0402, Manufacturer=GENERIC, Manufacturer1 ComponentHeight=0.4mm, Manufacturer1 Example="YAGEO PHYCOMP", Manufacturer1 Part Number=232270671003L, Power=0.0625W, Tolerance=±1%, Author="CERN DEM JLC", Component Type=Standard, CreateDate=03.12.2007, HelpURL=\\cern.ch\dfs\Applications\Altium\Datasheets\R0402_Phycomp_RC0402.pdf, LatestRevisionDate=17.10.2012, Manufacturer Part Number=R0402_10K_1%_0.0625W_100PPM, Mounted=Yes, Part Description="General Purpose Thick Film Chip Resistor", Part Number=R0402_10K_1%_0.0625W_100PPM, Pin Count=2, Sense=No, SMD=Yes, Socket=No, Status="Not recommended", TC=±100ppm/°C
R2 R3 R4 R7: library part R0402_470R_1%_0.0625W_100PPM, "Resistor - 1%", Case=0402, Manufacturer=GENERIC, Manufacturer1 ComponentHeight=0.4mm, Manufacturer1 Example="YAGEO PHYCOMP", Manufacturer1 Part Number=232270674701L, Power=0.0625W, Tolerance=±1%, Author="CERN DEM JLC", Component Type=Standard, CreateDate=03.12.2007, HelpURL=\\cern.ch\dfs\Applications\Altium\Datasheets\R0402_Phycomp_RC0402.pdf, LatestRevisionDate=17.10.2012, Manufacturer Part Number=R0402_470R_1%_0.0625W_100PPM, Mounted=Yes, Part Description="General Purpose Thick Film Chip Resistor", Part Number=R0402_470R_1%_0.0625W_100PPM, Pin Count=2, PressFit=No, Sense=No, SMD=Yes, Socket=No, Status="Not Recommended", TC=±100ppm/°C
R5 R6: library part R0603_0R_JUMPER, "Resistor", Case=0603, Manufacturer=GENERIC, Manufacturer1 ComponentHeight=0.55mm, Manufacturer1 Example="NIC COMPONENT", Manufacturer1 Part Number=NRC06Z0, Author="CERN DEM JLC", Component Type=Standard, CreateDate=03.12.2007, HelpURL=\\cern.ch\dfs\Applications\Altium\Datasheets\R0603_NIC_NRC.pdf, LatestRevisionDate=13.03.2008, Manufacturer Part Number=R0603_0R_JUMPER, Mounted=Yes, Part Description="1A (0.05R Max DC Resistance) Zero Ohm Jumper", Part Number=R0603_0R_JUMPER, Pin Count=2, PressFit=No, Sense=No, SMD=Yes, Socket=No, Status=Preferred
R8 R9 R131A R131B R131C R131D R131E R131F R131G R131H R131I R131J R131K R131L R131M R131N R131O R131P R131Q R131R R131S R131T R131U: library part R0402_100R_1%_0.1W_100PPM, "Resistor - 1%", Case=0402, Manufacturer=GENERIC, Manufacturer1 ComponentHeight=0.4mm, Manufacturer1 Example=PANASONIC, Manufacturer1 Part Number=ERJ2RKF1000X, Manufacturer Part Number=R0402_100R_1%_0.1W_100PPM_50V, Power=0.1W, Tolerance=±1%, Voltage=50V, Author="CERN DEM JLC", Component Type=Standard, CreateDate=12.12.2013, HelpURL=\\cern.ch\dfs\Applications\Altium\Datasheets\R0402_PANASONIC_ERJ2RK.pdf, LatestRevisionDate=03.03.2015, Mounted=Yes, Part Description="General Purpose Thick Film Chip Resistor", Part Number=R0402_100R_1%_0.1W_100PPM, Pin Count=2, Sense=No, SMD=Yes, Socket=No, Status="Not recommended", TC=±100ppm/°C
R10: library part R0402_31K6_0.1%_0.063W_25PPM_YAGEO_RT, "Resistor - 0.1%", Case=0402, Manufacturer=YAGEO, Manufacturer Part Number=RT0402BRD0731K6L, Power=0.063W, Tolerance=±0.1%, Voltage=50V, Author="CERN DEM BC", Component Type=Standard, ComponentHeight=0.35mm, CreateDate=30.07.2020, HelpURL=\\cern.ch\dfs\Applications\Altium\Datasheets\R0402_YAGEO_RT.pdf, LatestRevisionDate=30.07.2020, Mounted=Yes, Part Description="Thin Film Chip Resistor", Part Number=R0402_31K6_0.1%_0.063W_25PPM_YAGEO_RT, Pin Count=2, PressFit=No, Sense=No, SMD=Yes, Socket=No, Status="Not Recommended", TC=±25ppm/°C
R121: library part R0603_270K_1%_0.1W_100PPM, "Resistor - 1%", Case=0603, Manufacturer=GENERIC, Manufacturer1 ComponentHeight=0.55mm, Manufacturer1 Example="NIC COMPONENT", Manufacturer1 Part Number=NRC06F2703TRF, Power=0.1W, Tolerance=±1%, Author="CERN DEM JLC", Component Type=Standard, CreateDate=03.12.2007, HelpURL=\\cern.ch\dfs\Applications\Altium\Datasheets\R0603_NIC_NRC.pdf, LatestRevisionDate=13.03.2008, Manufacturer Part Number=R0603_270K_1%_0.1W_100PPM, Mounted=Yes, Part Description="General Purpose Thick Film Chip Resistor", Part Number=R0603_270K_1%_0.1W_100PPM, Pin Count=2, Sense=No, SMD=Yes, Socket=No, Status=Preferred, TC=±100ppm/°C
R122: library part R0603_82K_1%_0.1W_100PPM, "Resistor - 1%", Case=0603, Manufacturer=GENERIC, Manufacturer1 ComponentHeight=0.55mm, Manufacturer1 Example="NIC COMPONENT", Manufacturer1 Part Number=NRC06F8202TRF, Power=0.1W, Tolerance=±1%, Author="CERN DEM JLC", Component Type=Standard, CreateDate=03.12.2007, HelpURL=\\cern.ch\dfs\Applications\Altium\Datasheets\R0603_NIC_NRC.pdf, LatestRevisionDate=13.03.2008, Manufacturer Part Number=R0603_82K_1%_0.1W_100PPM, Mounted=Yes, Part Description="General Purpose Thick Film Chip Resistor", Part Number=R0603_82K_1%_0.1W_100PPM, Pin Count=2, Sense=No, SMD=Yes, Socket=No, Status=Preferred, TC=±100ppm/°C
SCREW1 SCREW2 SCREW3 SCREW4: library part MECH_MDR_screw_lock, "VHDCI Female Screw Lock", Manufacturer=3M, Part Number=3M_3341-31, Author=GK, ComponentHeight=5.48mm, Component Type=Mechanical, CreateDate=10.09.2013, HelpURL=\\cern.ch\dfs\Applications\Altium\Datasheets\TYCO_749087-2.pdf, LatestRevisionDate=10.09.2013, Manufacturer Part Number=3341-31, Mounted=Yes, PackageDescription="MDR Female Screw Locks, Thread Size: M2.5", Part Description="MDR Female Screw Locks, Thread Size: M2.5", Pin Count=0, PressFit=No, Sense=No, SMD=No, Socket=No, Status=None

## Free pads (board coordinates)
  round 236.22 hole 125.98: 0(9905.21,6565.21) 1(9905.21,9911.67) 2(8724.11,9911.67) 3(8724.11,6565.21)

## Via types
v1: diameter 19.68, hole 7.87, TopLayer to Bottom Layer, tented both sides, 241 vias

## Nets (pads, with @x,y where several pads share a name; then routed paths per layer and width w, separated by ;. In a path a pad name is that pad's centre, name@x,y a point inside that pad or via, vN(x,y) a via of type N, cw(c..) or ccw(c..) an arc to the next point about the centre after c; other vN are vias at no path point)
CC0_N: D1I.6 IC20I.5 J1.18 | length 955
  TopLayer w6: v1(8456.12,7270.69) 8456.12,7279.1 8460.14,7283.13 IC20I.5@8486.71,7283.13